# EAGLE board darwin-radio-panel (EAGLE 9.4.2)
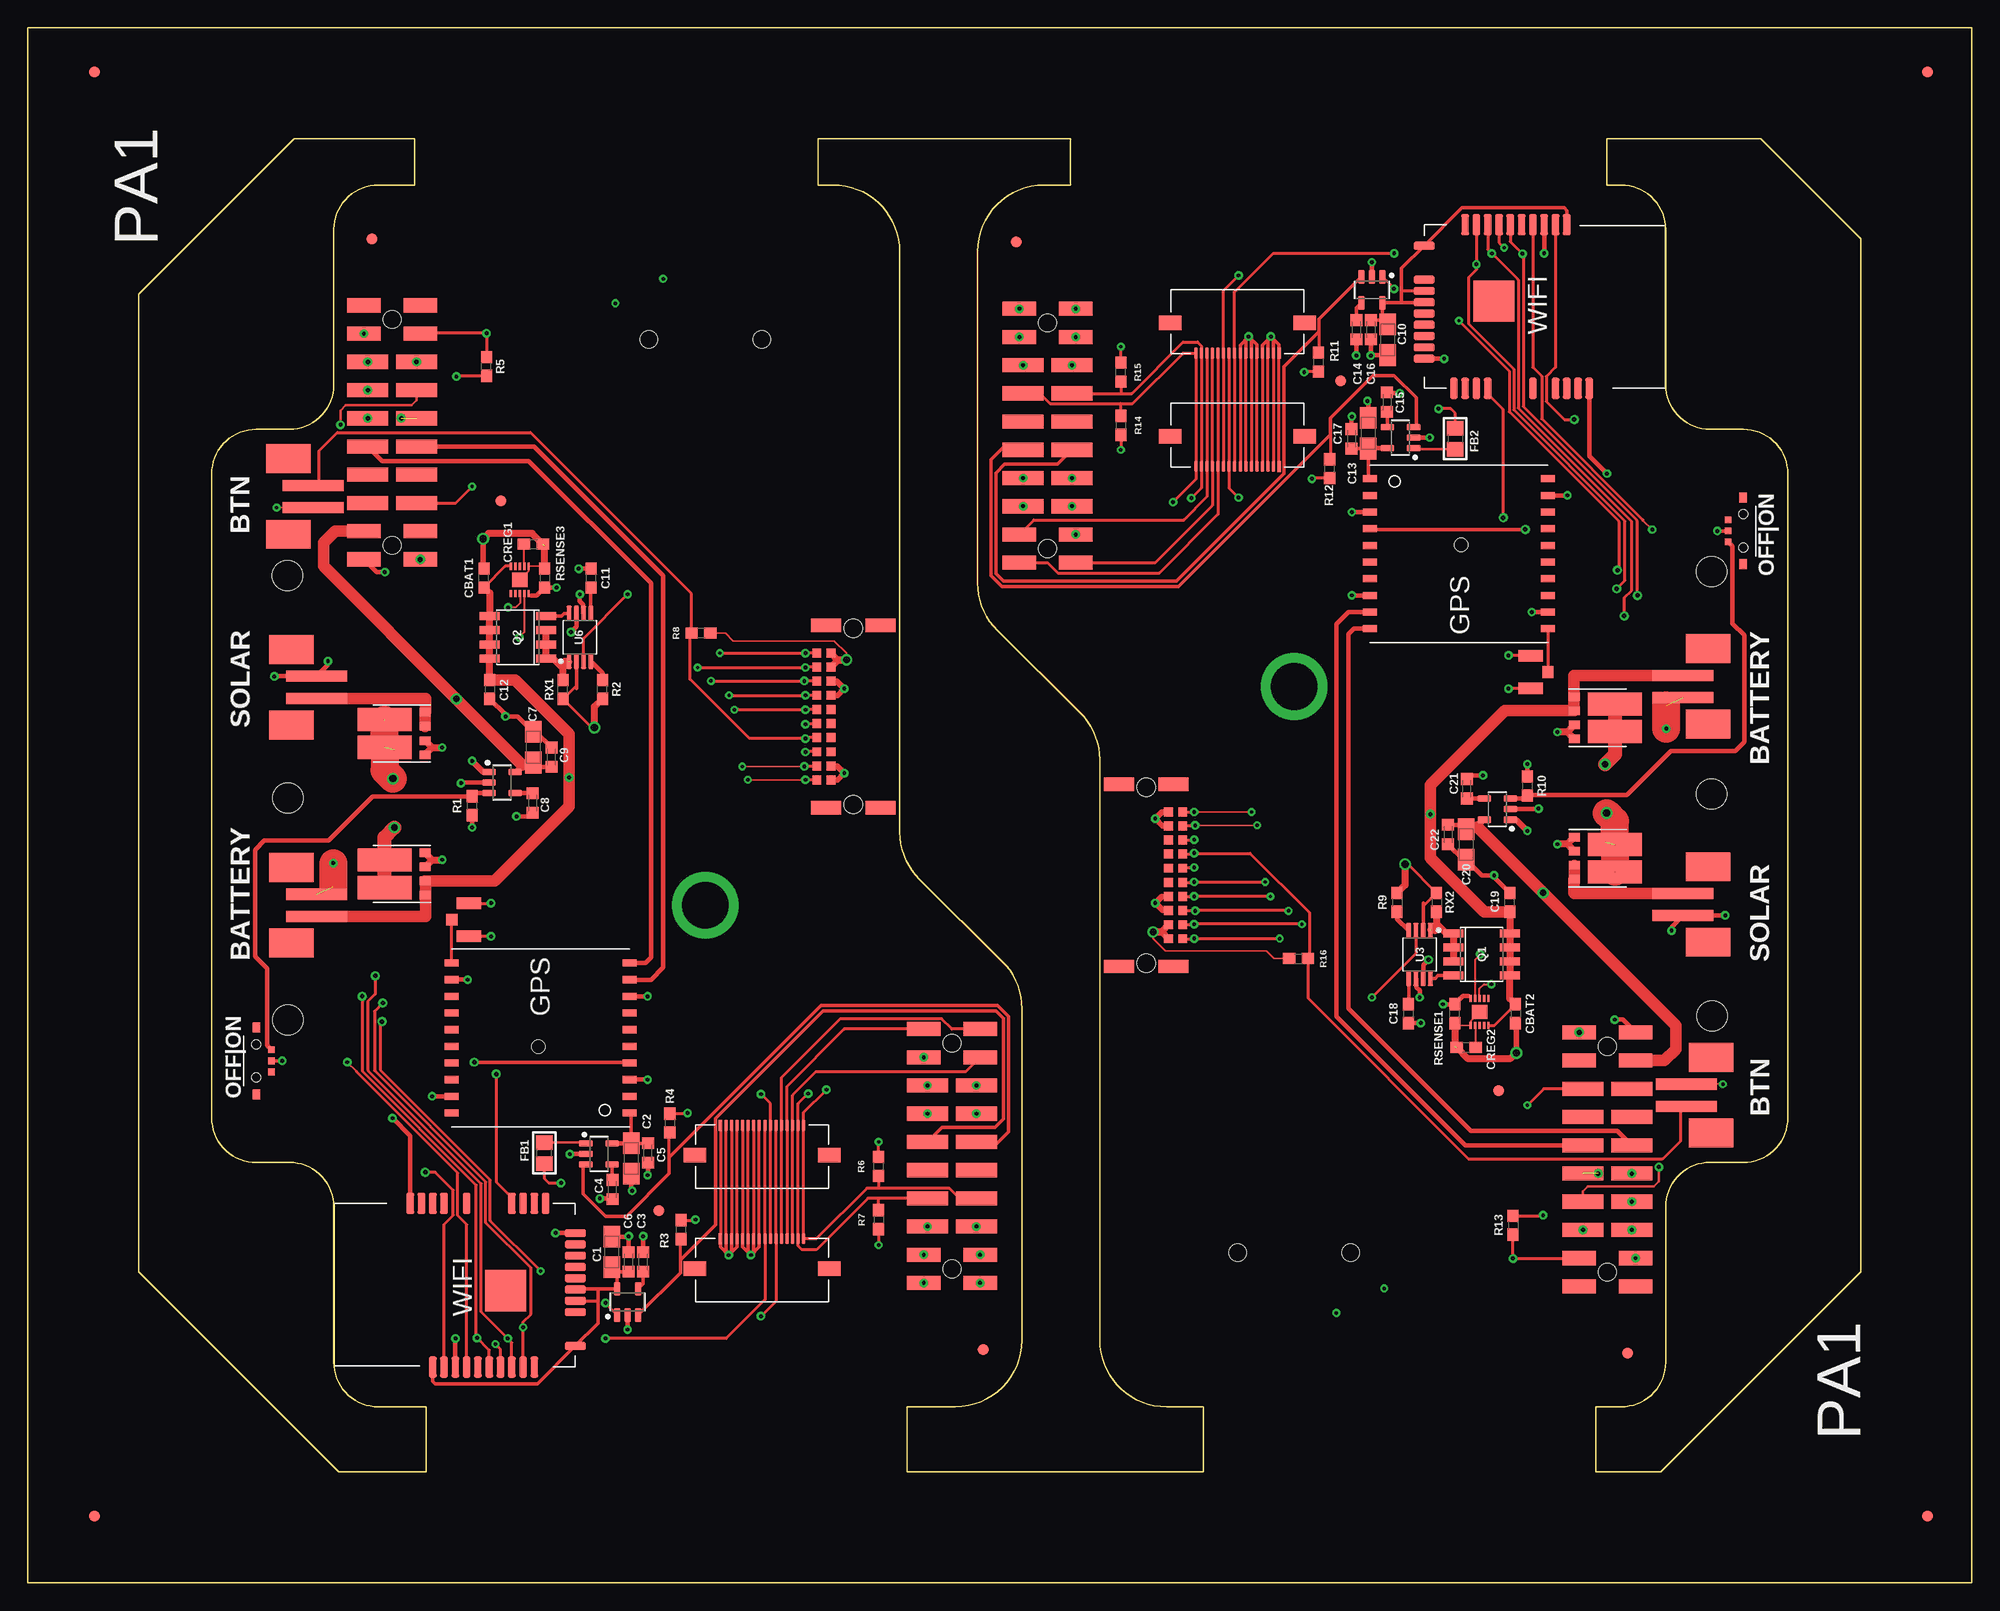
[diagram p0: board, top side]
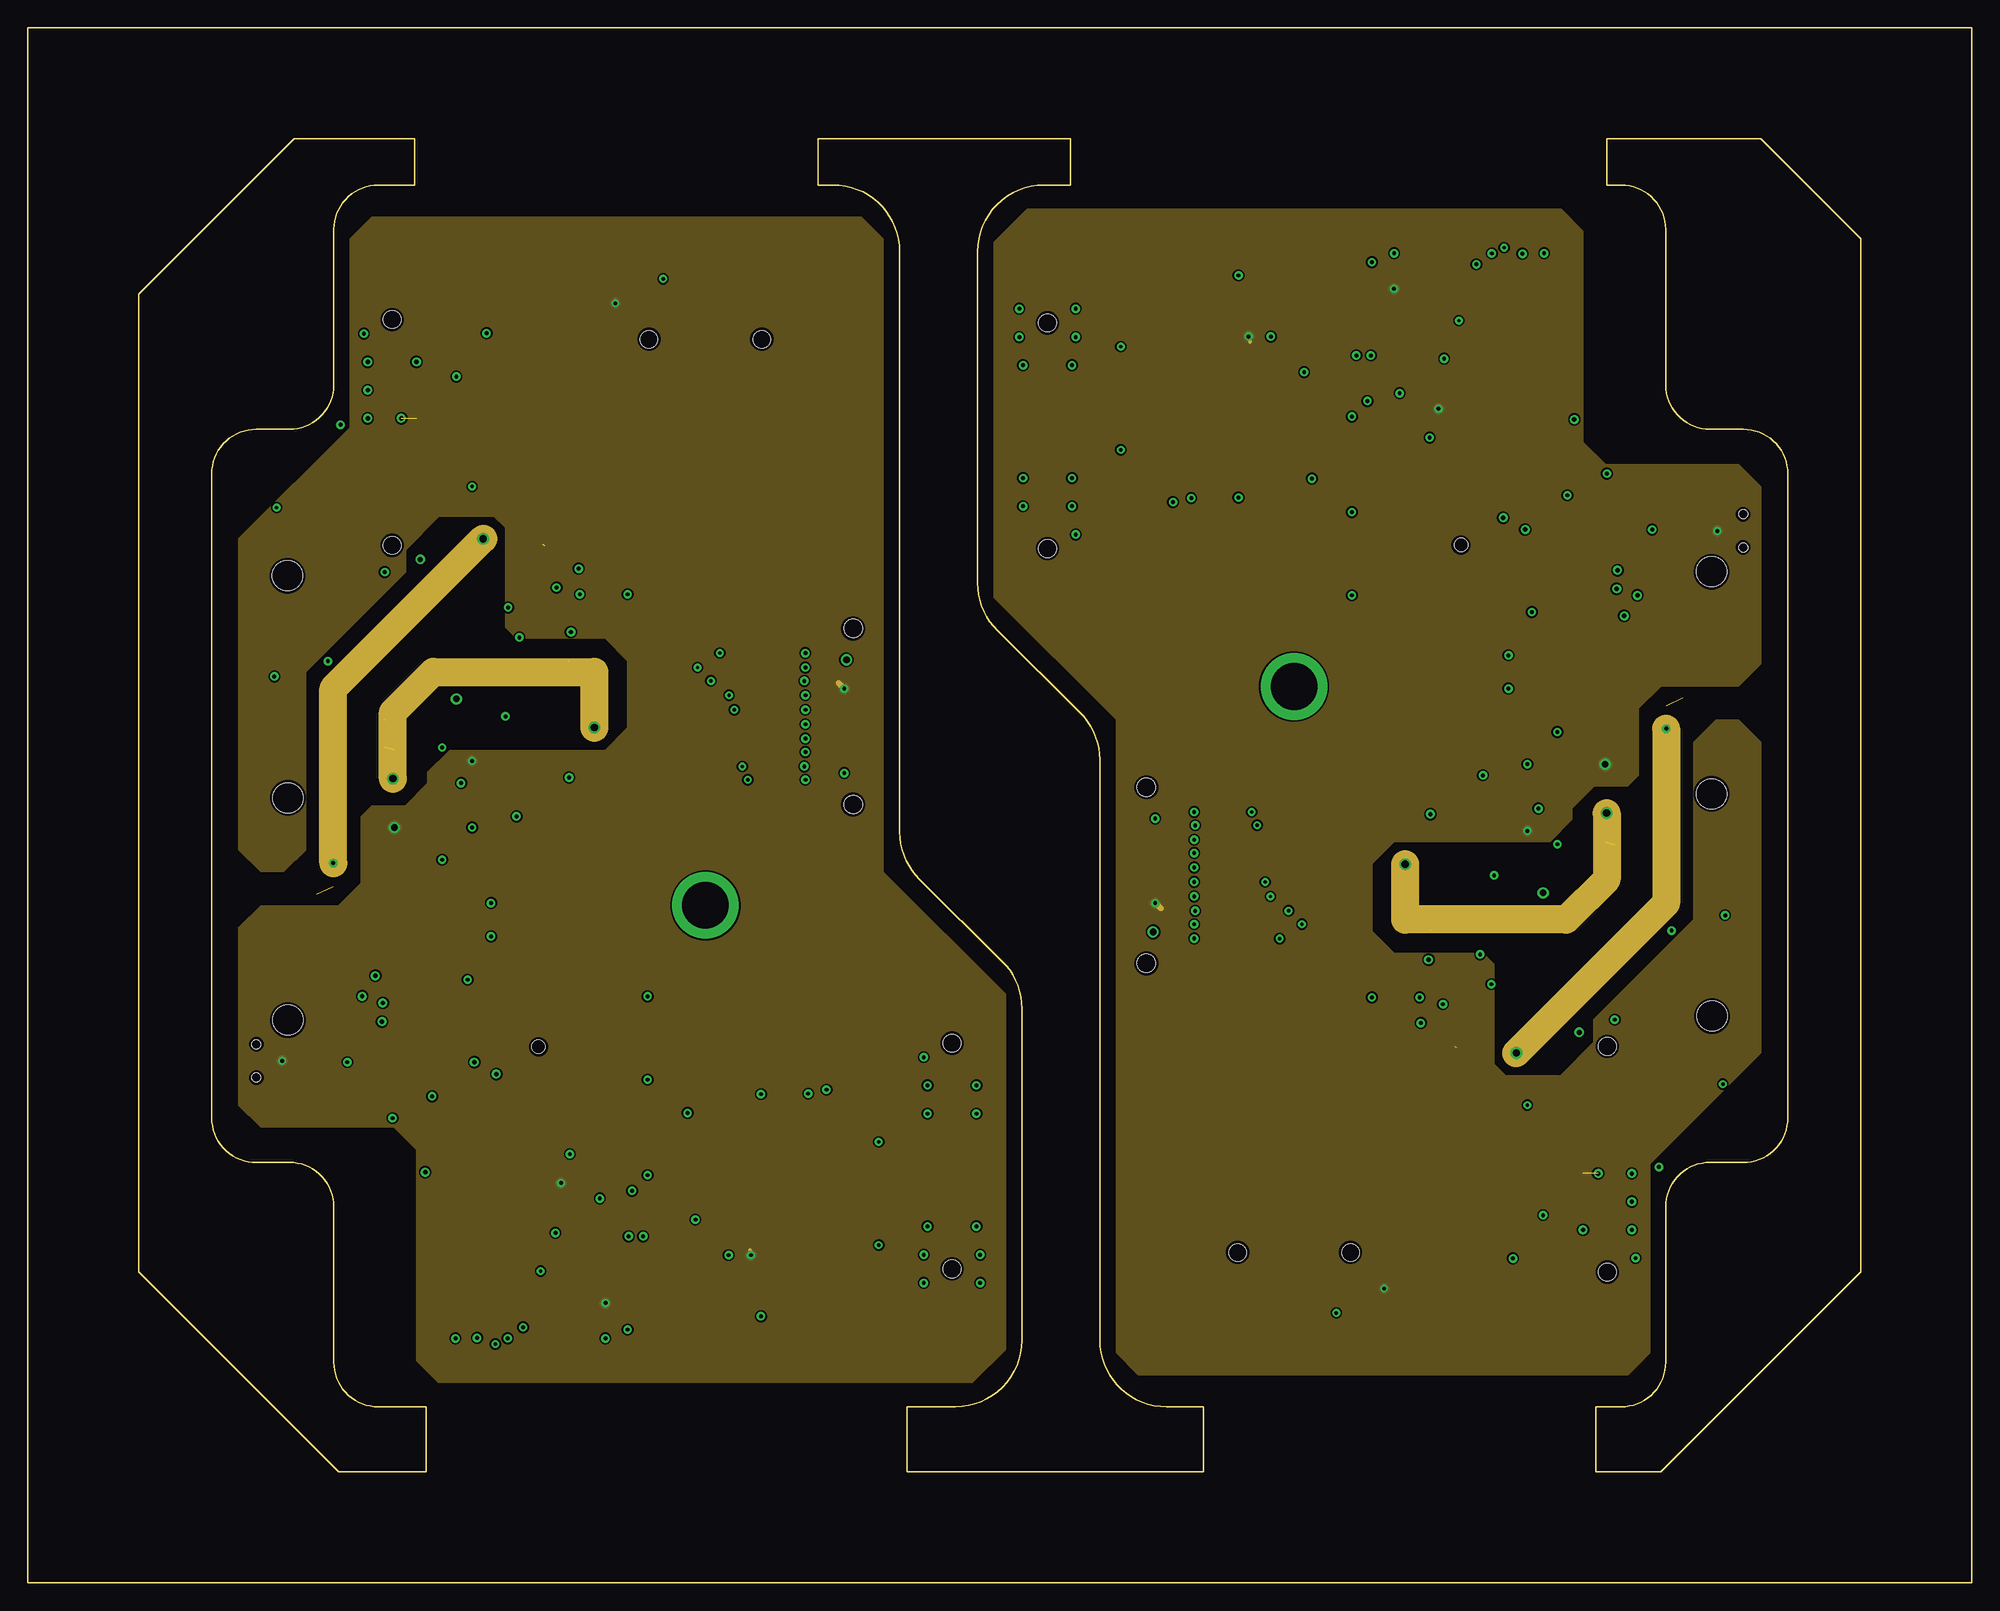
[diagram p1: board, inner layer PWR]
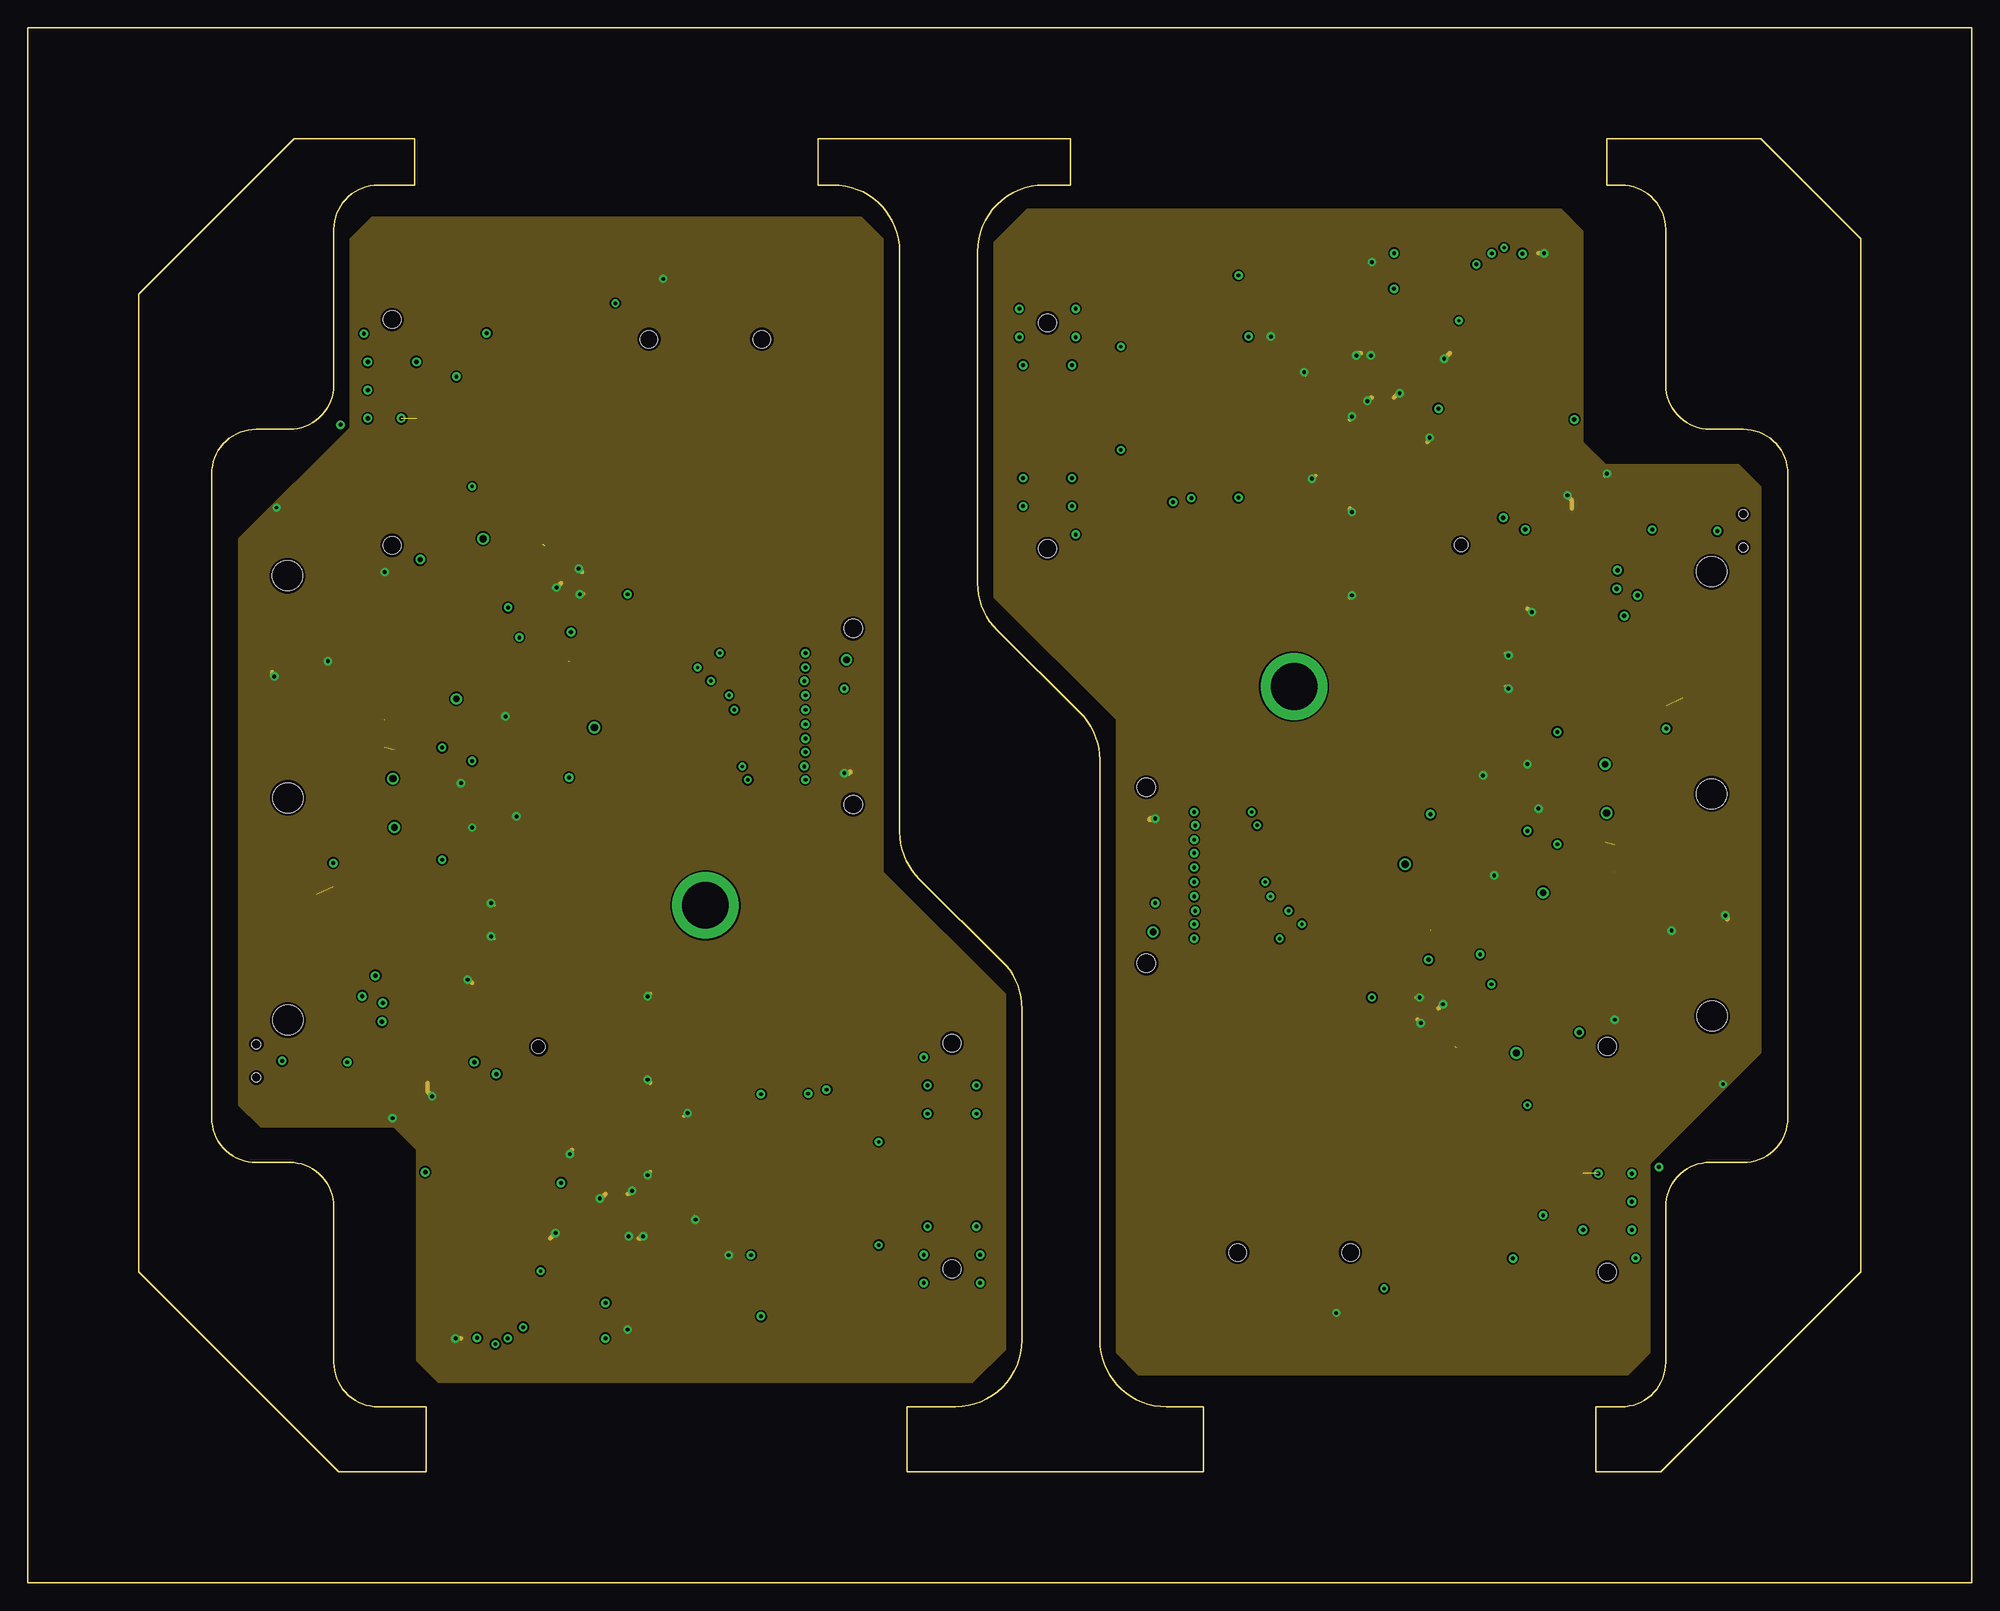
[diagram p2: board, inner layer GND]
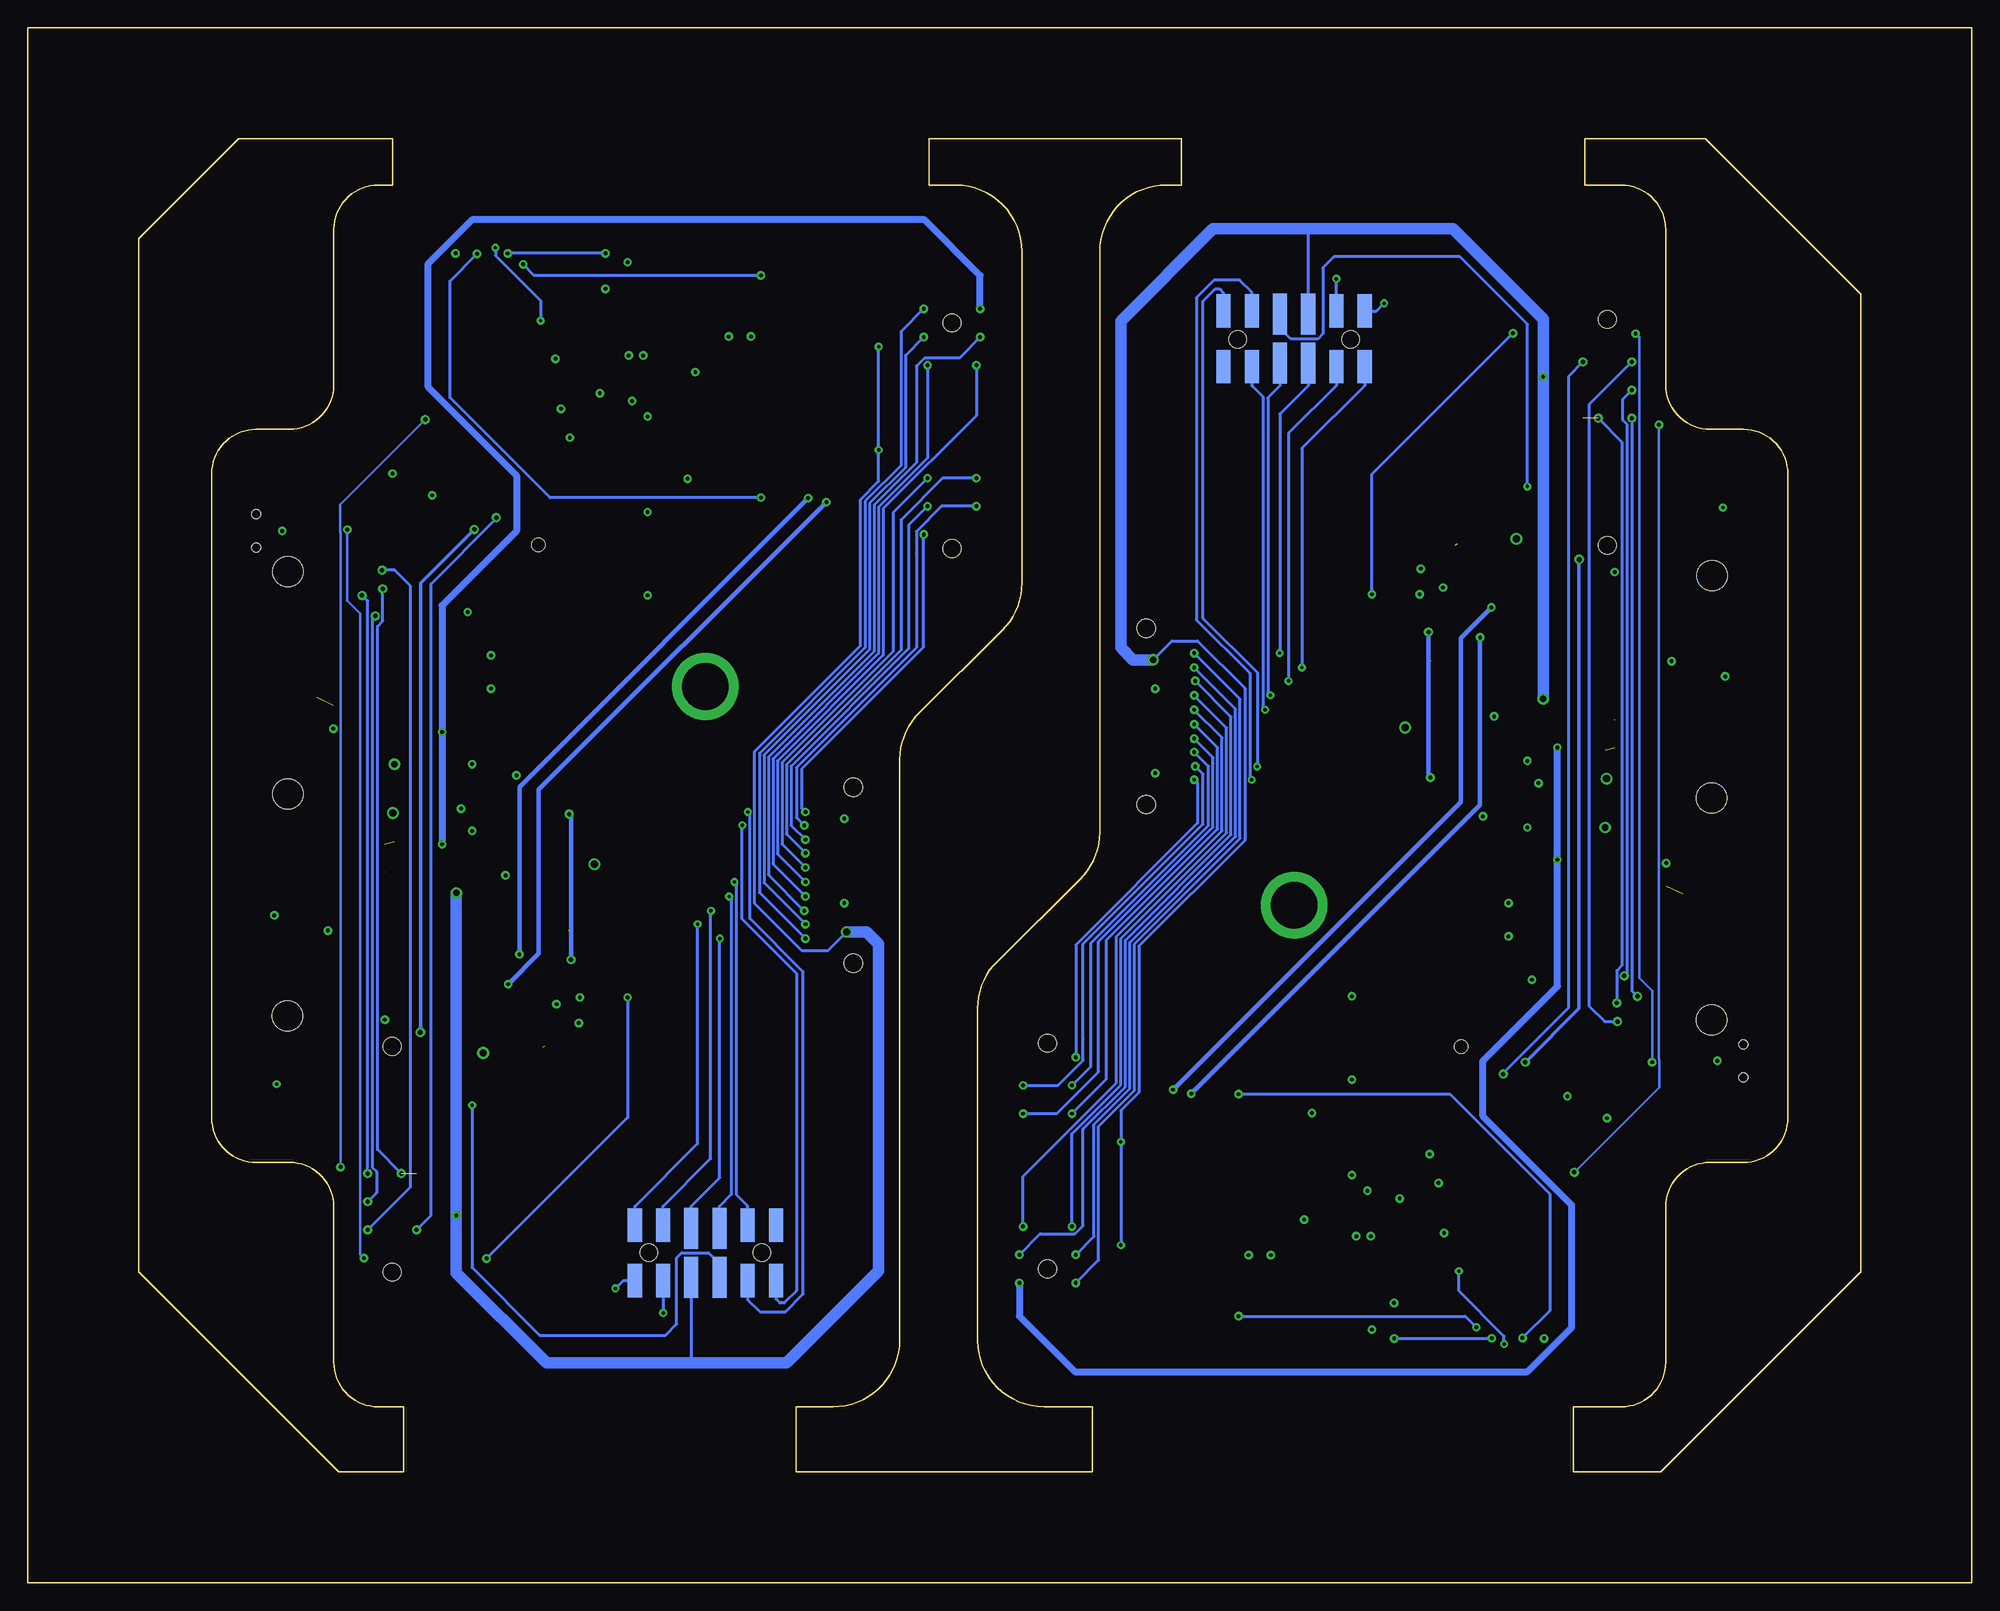
[diagram p3: board, bottom side, seen from below]

Size 175 x 140 mm. Coordinates in mm from the lower left corner, seen from the top.
Outline: 31.56,125.85 arc90 27.56,121.85 27.56,107.85 arc-90 23.56,103.85 20.56,103.85 arc90 16.56,99.85 16.56,41.85 arc90 20.56,37.85 23.56,37.85 arc-90 27.56,33.85 27.56,19.85 arc90 31.56,15.85 35.85,15.85 35.85,10 28,10 10,28 10,116 24,130 34.85,130 34.85,125.85 31.56,125.85
Outline: 83.5,15.85 arc90 89.5,21.85 89.5,51.7 arc45 87.72,55.96 80.28,63.34 arc-45 78.5,67.6 78.5,119.85 arc90 72.5,125.85 71.15,125.85 71.15,130 93.85,130 93.85,125.85 91.5,125.85 arc90 85.5,119.85 85.5,90 arc45 87.28,85.74 94.72,78.36 arc-45 96.5,74.1 96.5,21.85 arc90 102.5,15.85 105.85,15.85 105.85,10 79.15,10 79.15,15.85 83.5,15.85
Outline: 143.44,15.85 arc90 147.44,19.85 147.44,33.85 arc-90 151.44,37.85 154.44,37.85 arc90 158.44,41.85 158.44,99.85 arc90 154.44,103.85 151.44,103.85 arc-90 147.44,107.85 147.44,121.85 arc90 143.44,125.85 142.15,125.85 142.15,130 156,130 165,121 165,28 147,10 141.15,10 141.15,15.85 143.44,15.85
Outline: 0,0 0,140 175,140 175,0 0,0
Copper layers (1+2*15+16): Top 0.035mm / dielectric 1.5mm / PWR 0.035mm / dielectric 0.15mm / GND 0.035mm / dielectric 0.2mm / Bottom 0.035mm
Design rules "default *": minimum track width 6mil, minimum drill 0.3mm, track to track 6mil, track to pad 6mil, pad to pad 6mil, via to via 6mil, smd to smd 6mil, copper to edge 10mil, drill to drill 6mil, minimum pad ring 10mil, minimum via ring 8mil, stop-mask expansion 4mil, vias tented up to drill 1mm, thermal gap 10mil
Holes 2.7 mm at 23.42,50.67 23.42,70.67 23.37,90.67 151.58,91.03 151.58,71.03 151.63,51.03

## Footprints (pad centres in the part's own frame; a part is rotated, then mirrored left to right if it is on the bottom)
A/3216-18R = smd 1.95 x 1.5: + 1.375,0; - -1.375,0
C0603K = smd 1.05 x 1.08: 1 -0.875,0; 2 0.875,0
0603 = smd 1.1 x 1: 1 -0.85,0; 2 0.85,0
V10KL45DUHM3/H = smd 0.762 x 0.991: A1-1 -1.905,0.495; A1-2 -0.635,0.495; A2-1 0.635,0.495; A2-2 1.905,0.495 | smd 2.083 x 4.851: K1 -1.245,4.153; K2 1.245,4.153
0805 = smd 1.3 x 1.5: 1 -0.95,0; 2 0.95,0
FIDUCIAL_1MM = smd 1 x 1: 1 0,0
505110-1692 = smd 0.3 x 1: 1 -3.75,2.7; 2 -3.25,2.7; 3 -2.75,2.7; 4 -2.25,2.7; 5 -1.75,2.7; 6 -1.25,2.7; 7 -0.75,2.7; 8 -0.25,2.7; 9 0.25,2.7; 10 0.75,2.7; 11 1.25,2.7; 12 1.75,2.7; 13 2.25,2.7; 14 2.75,2.7; 15 3.25,2.7; 16 3.75,2.7 | smd 2 x 1.3: PAD1 -6.05,0; PAD2 6.05,0
M55-6102042R = smd 0.8 x 0.8: P1 -5.715,3.27; P2 -4.445,3.27; P3 -3.175,3.27; P4 -1.905,3.27; P5 -0.635,3.27; P6 0.635,3.27; P7 1.905,3.27; P8 3.175,3.27; P9 4.445,3.27; P10 5.715,3.27; P11 5.715,2; P12 4.445,2; P13 3.175,2; P14 1.905,2; P15 0.635,2; P16 -0.635,2; P17 -1.905,2; P18 -3.175,2; P19 -4.445,2; P20 -5.715,2 | smd 1.2 x 2.7: PAD0 -8.21,-2.45; PAD1 8.21,-2.45; PAD2 8.21,2.45; PAD3 -8.21,2.45 | hole 1.65: -7.925,0; 7.925,0
20PH = smd 3 x 1.27: PIN1 -0.34,0; PIN2 -0.34,-2.54; PIN9 -0.34,-20.32; PIN10 -0.34,-22.86; PIN11 4.74,-22.86; PIN12 4.74,-20.32; PIN19 4.74,-2.54; PIN20 4.74,0 | smd 3.68 x 1.27: PIN3 0,-5.08; PIN4 0,-7.62; PIN5 0,-10.16; PIN6 0,-12.7; PIN7 0,-15.24; PIN8 0,-17.78; PIN13 4.4,-17.78; PIN14 4.4,-15.24; PIN15 4.4,-12.7; PIN16 4.4,-10.16; PIN17 4.4,-7.62; PIN18 4.4,-5.08 | hole 1.58: 2.2,-1.27; 2.2,-21.59
SO08-IRF = smd 0.72 x 1.78: 1 -1.905,-2.543; 2 -0.635,-2.543; 3 0.635,-2.543; 4 1.905,-2.543; 5 1.905,2.543; 6 0.635,2.543; 7 -0.635,2.543; 8 -1.905,2.543
ATWINC = smd 1.9 x 0.7: 1 7.365,2.67; 2 7.365,3.686; 3 7.365,4.702; 4 7.365,5.718; 5 7.365,9.782; 6 7.365,11.814; 7 7.365,12.83; 8 7.365,13.846; 9 7.365,14.862; 10 -7.365,12.83; 11 -7.365,11.814; 12 -7.365,10.798; 13 -7.365,9.782; 14 -7.365,8.766; 15 -7.365,7.75; 16 -7.365,6.734; 17 -7.365,5.718; 18 -7.365,4.702; 19 -7.365,3.686 | smd 0.7 x 1.9: 20 -5.465,0; 21 -2.417,0; 22 -1.401,0; 23 -0.385,0; 24 0.631,0; 25 1.647,0; 26 2.663,0; 27 3.679,0; 28 4.695,0 | smd 3.7 x 3.7: PAD -0.485,6.27
SOP65P490X110-8 = smd 1.412 x 0.492: 1 -2.15,0.975; 2 -2.15,0.325; 3 -2.15,-0.325; 4 -2.15,-0.975; 5 2.15,-0.975; 6 2.15,-0.325; 7 2.15,0.325; 8 2.15,0.975
GPS_MODULE = smd 1.27 x 0.635: P$1 -8,6.75; P$2 -8,5.25; P$3 -8,3.75; P$4 -8,2.25; P$5 -8,0.75; P$6 -8,-0.75; P$7 -8,-2.25; P$8 -8,-3.75; P$9 -8,-5.25; P$10 -8,-6.75; P$11 8,-6.75; P$12 8,-5.25; P$13 8,-3.75; P$14 8,-2.25; P$15 8,-0.75; P$16 8,0.75; P$17 8,2.25; P$18 8,3.75; P$19 8,5.25; P$20 8,6.75 | hole 1.2: 0.2,0.8
SOT95P280X145-5 = smd 1.262 x 0.609: 1 -1.175,0.95; 2 -1.175,0; 3 -1.175,-0.95; 4 1.175,-0.95; 5 1.175,0.95
SSAJ110100 = smd 0.6 x 0.6: 1 1,1.355; 2 -1,1.355; C 0,1.355 | smd 0.9 x 0.7: PAD -3,0; PAD2 3,0 | hole 0.8: -1.5,0; 1.5,0
B2B-PH-SM4-TB = smd 1 x 5.5: + -1,-1; - 1,-1 | smd 2.6 x 4: PAD1 3.4,1.25; PAD2 -3.4,1.25
12PH = smd 3 x 1.27: 1 -2.5,6.35; 2 -2.5,3.81; 5 -2.5,-3.81; 6 -2.5,-6.35; 7 2.5,-6.35; 8 2.5,-3.81; 11 2.5,3.81; 12 2.5,6.35 | smd 3.68 x 1.27: 3 -2.2,1.27; 4 -2.2,-1.27; 9 2.2,-1.27; 10 2.2,1.27 | hole 1.58: 0.041,5.08; 0.041,-5.08
2337019-1 = smd 1.05 x 1: ANT 0,-1.525 | smd 1.05 x 2.2: GND -1.475,0; GND2 1.475,0
10DFN-EP = smd 0.2 x 0.65: P1 -0.8,-1.225; P2 -0.4,-1.225; P3 0,-1.225; P4 0.4,-1.225; P5 0.8,-1.225; P6 0.8,1.225; P7 0.4,1.225; P8 0,1.225; P9 -0.4,1.225; P10 -0.8,1.225 | smd 1.4 x 1.3: PAD 0,0

## Placement (x,y rotation side)
C1  6.8uf  [A/3216-18R]  52.59,29.79 270 top
C2  6.8uf  [A/3216-18R]  54.33,38.21 90 top
C3  [C0603K]  55.39,28.89 90 top
C4  [C0603K]  52.63,35.41 270 top
C5  .1uf  [C0603K]  55.83,38.71 270 top
C6  .1uf  [C0603K]  54.09,28.89 90 top
C7  6.8uf  [A/3216-18R]  45.5,75.23 270 top
C8  [C0603K]  45.46,70.21 270 top
C9  .1uf  [C0603K]  47.14,74.33 90 top
C10  6.8uf  [A/3216-18R]  122.41,111.91 90 top
C11  0.1uF  [0603]  50.73,90.46 90 top
C12  10uF  [0603]  41.58,80.43 270 top
C13  6.8uf  [A/3216-18R]  120.67,103.49 270 top
C14  [C0603K]  119.61,112.81 270 top
C15  [C0603K]  122.37,106.29 90 top
C16  .1uf  [C0603K]  120.91,112.81 270 top
C17  .1uf  [C0603K]  119.17,102.99 90 top
C18  0.1uF  [0603]  124.27,51.24 270 top
C19  10uF  [0603]  133.42,61.27 90 top
C20  6.8uf  [A/3216-18R]  129.5,66.47 90 top
C21  [C0603K]  129.54,71.49 90 top
C22  .1uf  [C0603K]  127.86,67.37 270 top
CBAT1  0.1uF  [0603]  41.07,90.46 90 top
CBAT2  0.1uF  [0603]  133.93,51.24 270 top
CREG1  10uF  [0603]  45.52,93.51 0 top
CREG2  10uF  [0603]  129.48,48.19 180 top
D1  V10KL45DUHM3/H  [V10KL45DUHM3/H]  36.27,63.82 90 top
D2  V10KL45DUHM3/H  [V10KL45DUHM3/H]  138.73,77.88 270 top
D3  V10KL45DUHM3/H  [V10KL45DUHM3/H]  36.27,76.46 90 top
D4  V10KL45DUHM3/H  [V10KL45DUHM3/H]  138.73,65.24 270 top
FB1  [0805]  46.5,38.7 90 top
FB2  [0805]  128.5,103 270 top
FID1  FIDUCIAL_1MM  [FIDUCIAL_1MM]  86,21 90 top
FID2  FIDUCIAL_1MM  [FIDUCIAL_1MM]  31,121 90 top
FID3  FIDUCIAL_1MM  [FIDUCIAL_1MM]  42.6,97.4 90 top
FID4  FIDUCIAL_1MM  [FIDUCIAL_1MM]  56.8,33.5 90 top
FID5  FIDUCIAL_1MM  [FIDUCIAL_1MM]  89,120.7 270 top
FID6  FIDUCIAL_1MM  [FIDUCIAL_1MM]  144,20.7 270 top
FID7  FIDUCIAL_1MM  [FIDUCIAL_1MM]  132.4,44.3 270 top
FID8  FIDUCIAL_1MM  [FIDUCIAL_1MM]  118.2,108.2 270 top
FID9  FIDUCIAL_1MM  [FIDUCIAL_1MM]  6,136 90 top
FID10  FIDUCIAL_1MM  [FIDUCIAL_1MM]  171,136 90 top
FID11  FIDUCIAL_1MM  [FIDUCIAL_1MM]  171,6 90 top
FID12  FIDUCIAL_1MM  [FIDUCIAL_1MM]  6,6 90 top
J1  505110-1692  [505110-1692]  66.1,28.28 0 top
J2  505110-1692  [505110-1692]  66.1,38.49 0 top
J3  M55-6102042R  [M55-6102042R]  74.3,78 90 top
J4  505110-1692  [505110-1692]  108.9,113.42 180 top
J5  505110-1692  [505110-1692]  108.9,103.21 180 top
J6  M55-6102042R  [M55-6102042R]  100.7,63.7 270 top
LOWER1  MOLEX-15-91-2200  [20PH]  81,49.86 0 top
LOWER2  MOLEX-15-91-2200  [20PH]  94,91.84 180 top
Q1  NDS8434  [SO08-IRF]  130.88,56.57 270 top
Q2  NDS8434  [SO08-IRF]  44.12,85.13 90 top
R1  100k  [0603]  40.02,69.96 90 top
R2  100k  [0603]  51.74,80.43 90 top
R3  100k  [0603]  58.8,31.8 270 top
R4  100k  [0603]  57.8,41.4 270 top
R5  100k  [0603]  41.3,109.5 90 top
R6  100k  [0603]  76.6,37.5 90 top
R7  100k  [0603]  76.6,32.7 270 top
R8  100k  [0603]  60.6,85.5 180 top
R9  100k  [0603]  123.26,61.27 270 top
R10  100k  [0603]  134.98,71.74 270 top
R11  100k  [0603]  116.2,109.9 90 top
R12  100k  [0603]  117.2,100.3 90 top
R13  100k  [0603]  133.7,32.2 270 top
R14  100k  [0603]  98.4,104.2 270 top
R15  100k  [0603]  98.4,109 90 top
R16  100k  [0603]  114.4,56.2 0 top
RSENSE1  100M  [0603]  128.47,51.24 90 top
RSENSE3  100M  [0603]  46.53,90.46 270 top
RX1  100M  [0603]  48.19,80.43 90 top
RX2  100M  [0603]  126.81,61.27 270 top
U1  ATWINC  [ATWINC]  49.29,26.79 90 top
U2  ATWINC  [ATWINC]  125.71,114.91 270 top
U3  MCP7384X  [SOP65P490X110-8]  125.29,56.57 270 top
U6  MCP7384X  [SOP65P490X110-8]  49.71,85.13 90 top
U$1  FGPMMOPA6H  [GPS_MODULE]  46.17,49.05 180 top
U$2  MIC5219-3.3YM5-TR  [SOT95P280X145-5]  51.43,38.61 0 top
U$3  MIC5219-3.3YM5-TR  [SOT95P280X145-5]  53.99,25.29 90 top
U$4  MIC5219-3.3YM5-TR  [SOT95P280X145-5]  42.7,72.05 0 top
U$5  SSAJ110100  [SSAJ110100]  20.58,46.99 270 top
U$6  B2B-PH-SM4-TB  [B2B-PH-SM4-TB]  25,80.63 90 top
U$7  B2B-PH-SM4-TB  [B2B-PH-SM4-TB]  25,61 90 top
U$8  2X6-HEADERSDS  [12PH]  61,112 270 bottom
U$9  B2B-PH-SM4-TB  [B2B-PH-SM4-TB]  24.7,97.8 90 top
U$10  FGPMMOPA6H  [GPS_MODULE]  128.83,92.65 0 top
U$11  2337019-1  [2337019-1]  39.7,59.7 270 top
U$12  MAX17055  [10DFN-EP]  44.3,90.3 0 top
U$13  MIC5219-3.3YM5-TR  [SOT95P280X145-5]  123.57,103.09 180 top
U$14  MIC5219-3.3YM5-TR  [SOT95P280X145-5]  121.01,116.41 270 top
U$15  MIC5219-3.3YM5-TR  [SOT95P280X145-5]  132.3,69.65 180 top
U$16  SSAJ110100  [SSAJ110100]  154.42,94.71 90 top
U$17  B2B-PH-SM4-TB  [B2B-PH-SM4-TB]  150,61.07 270 top
U$18  B2B-PH-SM4-TB  [B2B-PH-SM4-TB]  150,80.7 270 top
U$19  MAX17055  [10DFN-EP]  130.7,51.4 180 top
U$20  2337019-1  [2337019-1]  135.3,82 90 top
U$21  2X6-HEADERSDS  [12PH]  114,29.7 90 bottom
U$22  B2B-PH-SM4-TB  [B2B-PH-SM4-TB]  150.3,43.9 270 top
UPPER1  MOLEX-15-91-2200  [20PH]  35,92.14 180 top
UPPER2  MOLEX-15-91-2200  [20PH]  140,49.56 0 top

## Library data of the parts
C1-C10 C13-C17 C20-C22 = rcl; SPICEPREFIX: C
C11 C18 CBAT1 CBAT2 = SparkFun-Capacitors; PROD_ID: CAP-00810
C12 C19 CREG1 CREG2 = SparkFun-Capacitors; PROD_ID: CAP-11015
D1-D4 J1-J6 LOWER1 LOWER2 Q1 Q2 U1-U3 U6 U$1-U$22 UPPER1 UPPER2 = Conservify
FB1 FB2 = microbuilder
FID1-FID12 = microbuilder; BOM: EXCLUDE
R1-R16 = SparkFun-Resistors; PROD_ID: RES-07828
RSENSE1 RSENSE3 RX1 RX2 = SparkFun-Resistors; PROD_ID: RES-07868

## Nets
3V1: C20.+ C22.1 J6.P11 J6.P12 R13.1 R14.2 R15.2 R16.1 U$15.5 U$21.3 UPPER2.PIN19
3V3: C7.+ C9.1 J3.P11 J3.P12 R5.1 R6.2 R7.2 R8.1 U$4.5 U$8.3 UPPER1.PIN19
BACKPACK_ENABLE: U$8.4 UPPER1.PIN3
BACKPACK_ENABLE1: U$21.4 UPPER2.PIN3
BAT+: C12.1 CBAT1.1 D1.A1-1 D1.A1-2 Q2.5 Q2.6 Q2.7 Q2.8 U6.7 U$7.+ U$12.P10
BAT+1: C19.1 CBAT2.1 D2.A1-1 D2.A1-2 Q1.5 Q1.6 Q1.7 Q1.8 U3.7 U$18.+ U$19.P10
BAT-: CBAT1.2 CREG1.2 RSENSE3.1 U$7.- U$12.P6 U$12.PAD
BAT-1: CBAT2.2 CREG2.2 RSENSE1.1 U$18.- U$19.P6 U$19.PAD
CHARGESUPPLY: D3.K1 D3.K2 R2.1 RX1.1 U6.2
CHARGESUPPLY1: D4.K1 D4.K2 R9.1 RX2.1 U3.2
CHARGING: R5.2 U6.3 UPPER1.PIN9
CHARGING1: R13.2 U3.3 UPPER2.PIN9
D+: LOWER1.PIN6
D+1: LOWER2.PIN6
D-: LOWER1.PIN15
D-1: LOWER2.PIN15
EEPROM_PROT: J3.P1 LOWER1.PIN2 U$8.5
EEPROM_PROT1: J6.P1 LOWER2.PIN2 U$21.5
GND: C1.- C2.- C3.2 C4.2 C5.2 C6.2 C7.- C8.2 C9.2 C11.2 C12.2 J1.1 J1.2 J1.3 J1.4 J2.1 J2.2 J2.3 J2.4 J3.P19 J3.P20 R1.1 R3.1 R4.1 RSENSE3.2 U1.9 U1.12 U1.28 U6.6 U$1.P$3 U$1.P$8 U$1.P$12 U$1.P$19 U$2.2 U$3.2 U$4.2 U$6.- U$8.2 U$9.+ U$11.GND U$11.GND2 U$12.P5 UPPER1.PIN20
GND1: C10.- C13.- C14.2 C15.2 C16.2 C17.2 C18.2 C19.2 C20.- C21.2 C22.2 J4.1 J4.2 J4.3 J4.4 J5.1 J5.2 J5.3 J5.4 J6.P19 J6.P20 R10.1 R11.1 R12.1 RSENSE1.2 U2.9 U2.12 U2.28 U3.6 U$10.P$3 U$10.P$8 U$10.P$12 U$10.P$19 U$13.2 U$14.2 U$15.2 U$17.- U$19.P5 U$20.GND U$20.GND2 U$21.2 U$22.+ UPPER2.PIN20
GPS_ENABLE: LOWER1.PIN16 R4.2 U$2.3
GPS_ENABLE1: LOWER2.PIN16 R12.2 U$13.3
GPS_RX: U$1.P$9 UPPER1.PIN5
GPS_RX1: U$10.P$9 UPPER2.PIN5
GPS_TX: U$1.P$10 UPPER1.PIN16
GPS_TX1: U$10.P$10 UPPER2.PIN16
HOTSWAP_INT: J3.P3 LOWER1.PIN3
HOTSWAP_INT1: J6.P3 LOWER2.PIN3
MOD_G0: J1.13 J2.13 LOWER1.PIN1
MOD_G1: J4.13 J5.13 LOWER2.PIN1
MOD_G2: J3.P2 LOWER1.PIN18 U$8.6
MOD_G3: J6.P2 LOWER2.PIN18 U$21.6
MOD_G4: J6.P5 LOWER2.PIN4
MOD_G5: J3.P5 LOWER1.PIN4
MOD_G6: J4.14 J5.14 LOWER2.PIN19
MOD_G7: J4.12 J5.12 LOWER2.PIN20
MOD_G13: J1.14 J2.14 LOWER1.PIN19
MOD_G14: J1.12 J2.12 LOWER1.PIN20
MOD_MISO: J3.P10 LOWER1.PIN10 U$8.10
MOD_MISO1: J6.P10 LOWER2.PIN10 U$21.10
MOD_MOSI: J3.P8 LOWER1.PIN12 U$8.11
MOD_MOSI1: J6.P8 LOWER2.PIN12 U$21.11
MOD_SCK: J3.P9 LOWER1.PIN9 U$8.12
MOD_SCK1: J6.P9 LOWER2.PIN9 U$21.12
MOD_SCL: J3.P6 LOWER1.PIN13 U$8.8
MOD_SCL1: J6.P6 LOWER2.PIN13 U$21.8
MOD_SDA: J3.P7 LOWER1.PIN8 U$8.9
MOD_SDA1: J6.P7 LOWER2.PIN8 U$21.9
N$1: C3.1 U$3.4
N$2: C4.1 U$2.4
N$3: C2.+ C5.1 U$1.P$1 U$2.5
N$4: U$1.P$11 U$11.ANT
N$5: R2.2 U6.4
N$6: C8.1 U$4.4
N$7: FB1.2 U$2.1
N$8: R1.2 U$4.3 U$5.2
N$11: C14.1 U$14.4
N$12: C15.1 U$13.4
N$13: C13.+ C17.1 U$10.P$1 U$13.5
N$14: Q2.1 Q2.2 Q2.3 RX1.2 U6.1
N$16: Q1.1 Q1.2 Q1.3 RX2.2 U3.1
N$17: Q2.4 U6.8
N$18: C11.1 U6.5
N$19: CREG1.1 U$12.P7
N$20: Q1.4 U3.8
N$21: C18.1 U3.5
N$22: CREG2.1 U$19.P7
N$23: R9.2 U3.4
N$24: C21.1 U$15.4
N$25: R10.2 U$15.3 U$16.2
N$26: U$10.P$11 U$20.ANT
N$27: FB2.2 U$13.1
PIN1: U$21.7
PIN7: U$8.7
RAD_SCL: J1.16 J2.16 LOWER1.PIN14 R6.1 U$12.P3
RAD_SCL1: J4.16 J5.16 LOWER2.PIN14 R14.1 U$19.P3
RAD_SDA: J1.15 J2.15 LOWER1.PIN7 R7.1 U$12.P4
RAD_SDA1: J4.15 J5.15 LOWER2.PIN7 R15.1 U$19.P4
RADIO_MISO: J1.9 J2.9 U1.17 UPPER1.PIN14
RADIO_MISO1: J4.9 J5.9 U2.17 UPPER2.PIN14
RADIO_MOSI: J1.10 J2.10 U1.15 UPPER1.PIN15
RADIO_MOSI1: J4.10 J5.10 U2.15 UPPER2.PIN15
RADIO_SCK: J1.11 J2.11 U1.18 UPPER1.PIN6
RADIO_SCK1: J4.11 J5.11 U2.18 UPPER2.PIN6
RESET: UPPER1.PIN4
RESET1: UPPER2.PIN4
SOL+: D3.A2-1 D3.A2-2 U$6.+
SOL+1: D4.A2-1 D4.A2-2 U$17.+
SWCLK: UPPER1.PIN10
SWCLK1: UPPER2.PIN10
SWDIO: UPPER1.PIN11
SWDIO1: UPPER2.PIN11
UNREG: D1.K1 D1.K2 FB1.1 J1.5 J1.6 J1.7 J1.8 J2.5 J2.6 J2.7 J2.8 J3.P13 J3.P14 U$3.1 U$4.1 U$5.C U$8.1
UNREG1: D2.K1 D2.K2 FB2.1 J4.5 J4.6 J4.7 J4.8 J5.5 J5.6 J5.7 J5.8 J6.P13 J6.P14 U$14.1 U$15.1 U$16.C U$21.1
V1: D2.A2-1 D2.A2-2 D4.A1-1 D4.A1-2 LOWER2.PIN11
V5: D1.A2-1 D1.A2-2 D3.A1-1 D3.A1-2 LOWER1.PIN11
VBACKUP: U$1.P$4 UPPER1.PIN1
VBACKUP1: U$10.P$4 UPPER2.PIN1
WIFI_3V1: C10.+ C16.1 U2.10 U2.20 U2.22 U2.23 U$14.5
WIFI_3V3: C1.+ C6.1 U1.10 U1.20 U1.22 U1.23 U$3.5
WIFI_CS: U1.16 UPPER1.PIN13
WIFI_CS1: U2.16 UPPER2.PIN13
WIFI_ENABLE: LOWER1.PIN5 R3.2 U$3.3
WIFI_ENABLE1: LOWER2.PIN5 R11.2 U$14.3
WIFI_IRQ: U1.13 UPPER1.PIN12
WIFI_IRQ1: U2.13 UPPER2.PIN12
WIFI_RST: U1.4 UPPER1.PIN8
WIFI_RST1: U2.4 UPPER2.PIN8
WIFI_WAKE: U1.11 UPPER1.PIN7
WIFI_WAKE1: U2.11 UPPER2.PIN7
X1: UPPER2.PIN2
X2: UPPER1.PIN2
X3: UPPER2.PIN17
X4: UPPER1.PIN17
X5: UPPER1.PIN18
X6: UPPER2.PIN18
XBTN: J3.P4 LOWER1.PIN17 R8.2 U$9.-
XBTN1: J6.P4 LOWER2.PIN17 R16.2 U$22.-
XX1: J3.P18
XX2: J3.P17
XX3: J3.P16
XX4: J3.P15
XX5: J6.P16
XX6: J6.P18
XX7: J6.P17
XX8: J6.P15

## Tracks (layer width: path | path; a pad name or v marks a point on that pad's centre or on a via)
3V1  (via drill 0.3, 0.35, 0.6)
  Top 0.152: R16.1 112.2,56.2 111.5,56.9 102.4,56.9 101.3,58 v101.3,58.6
  Top 0.254: R13.1 136.37,33.05 v136.42,33.1 | R15.2 v98.4,111.3 | R14.2 v98.4,102
  Top 0.406: U$15.5 130.48,68.06 130.27,67.84 C20.+ 129.1,68.24 C22.1
  Top 0.61: J6.P11 102.08,58.6 v101.3,58.6 102.05,58.6 J6.P12
  Top 1.016: UPPER2.PIN19 147.35,47.02 148.37,48.04 148.37,50.17 v136.42,62.12 130.48,68.06
  Bottom 0.152: 115.27,19.83 115.3,19.8
  Bottom 0.254: v101.3,58.6 103,56.9 105.3,56.9 109.55,61.15 109.55,74.85 100.03,84.37 100.03,97.54 98.4,99.17 v98.4,102 v98.4,111.3 | U$21.3 115.27,19.83
  Bottom 1.016: v136.42,62.12 v136.42,33.1 136.42,27.92 128.3,19.8 115.3,19.8 106.7,19.8 98.4,28.1 98.4,57.5 99.5,58.6 v101.3,58.6
3V3  (via drill 0.3, 0.35, 0.6)
  Top 0.152: R8.1 62.8,85.5 63.5,84.8 72.6,84.8 73.7,83.7 v73.7,83.1
  Top 0.254: R5.1 38.63,108.65 v38.58,108.6 | R7.2 v76.6,30.4 | R6.2 v76.6,39.7
  Top 0.406: U$4.5 44.52,73.64 44.73,73.86 C7.+ 45.9,73.46 C9.1
  Top 0.61: J3.P11 72.92,83.1 v73.7,83.1 72.95,83.1 J3.P12
  Top 1.016: UPPER1.PIN19 27.65,94.68 26.63,93.66 26.63,91.53 v38.58,79.58 44.52,73.64
  Bottom 0.152: 59.73,121.87 59.7,121.9
  Bottom 0.254: v73.7,83.1 72,84.8 69.7,84.8 65.45,80.55 65.45,66.85 74.97,57.33 74.97,44.16 76.6,42.53 v76.6,39.7 v76.6,30.4 | U$8.3 59.73,121.87
  Bottom 1.016: v38.58,79.58 v38.58,108.6 38.58,113.78 46.7,121.9 59.7,121.9 68.3,121.9 76.6,113.6 76.6,84.2 75.5,83.1 v73.7,83.1
BACKPACK_ENABLE  (via drill 0.3)
  Top 0.254: UPPER1.PIN3 38.52,97.22 v40,98.7
  Bottom 0.152: U$8.4 62.15,114.08 62.15,112.85
  Bottom 0.254: v40,98.7 40,113.3 46.1,119.4 57.4,119.4 58.42,118.38 58.42,112.44 58.88,111.98 61.28,111.98 62.15,112.85
BACKPACK_ENABLE1  (via drill 0.3)
  Top 0.254: UPPER2.PIN3 136.48,44.48 v135,43
  Bottom 0.152: U$21.4 112.85,27.62 112.85,28.85
  Bottom 0.254: v135,43 135,28.4 128.9,22.3 117.6,22.3 116.58,23.32 116.58,29.26 116.12,29.72 113.72,29.72 112.85,28.85
BAT+  (via drill 0.4)
  Top 0.254: U$12.P10 42.98,91.53 CBAT1.1
  Top 0.406: 35.78,63.18 D1.A1-2 | U6.7 49.38,86.08 v48.9,85.6
  Top 0.61: C12.1 Q2.8 Q2.7 Q2.6 Q2.5 41.58,89.11 CBAT1.1
  Top 1.016: 35.8,61.89 D1.A1-1 | D1.A1-2 35.8,63.16 35.8,61.89 | 35.8,61.89 35.8,60 U$7.+ | C12.1 43.89,81.28 48.73,76.44 v48.73,72.5 48.73,69.89 42.03,63.18 35.78,63.18
  Bottom 0.406: v48.9,85.6 48.9,72.67 v48.73,72.5
BAT+1  (via drill 0.4)
  Top 0.254: U$19.P10 132.01,50.17 CBAT2.1
  Top 0.406: 139.22,78.52 D2.A1-2 | U3.7 125.61,55.62 v126.1,56.1
  Top 0.61: C19.1 Q1.8 Q1.7 Q1.6 Q1.5 133.42,52.59 CBAT2.1
  Top 1.016: 139.2,79.81 D2.A1-1 | D2.A1-2 139.2,78.54 139.2,79.81 | 139.2,79.81 139.2,81.7 U$18.+ | C19.1 131.11,60.42 126.27,65.26 v126.27,69.2 126.27,71.81 132.97,78.52 139.22,78.52
  Bottom 0.406: v126.1,56.1 126.1,69.03 v126.27,69.2
BAT-  (via drill 0.35, 0.65)  (2 unrouted)
  Top 0.152: U$12.PAD 45.1,91.1 U$12.P6 46.32,91.53
  Top 0.2: 46.32,91.53 RSENSE3.1
  Top 0.508: CBAT1.2 41,91.39 41,91.93 41.01,91.94 41.01,92.4 41,92.41 v41,94
  Top 0.61: RSENSE3.1 46.53,93.39 | CREG1.2 45.41,94.47 41.47,94.47 v41,94
  Top 2.54: v27.5,64.8 27.5,62.7
  PWR 2.54: v41,94 27.5,80.5 v27.5,64.8
BAT-1  (via drill 0.35, 0.65)  (2 unrouted)
  Top 0.152: U$19.PAD 129.9,50.6 U$19.P6 128.68,50.17
  Top 0.2: 128.68,50.17 RSENSE1.1
  Top 0.508: CBAT2.2 134,50.31 134,49.77 133.99,49.76 133.99,49.3 134,49.29 v134,47.7
  Top 0.61: RSENSE1.1 128.47,48.31 | CREG2.2 129.59,47.23 133.53,47.23 v134,47.7
  Top 2.54: v147.5,76.9 147.5,79
  PWR 2.54: v134,47.7 147.5,61.2 v147.5,76.9
CHARGESUPPLY  (via drill 0.65)  (2 unrouted)
  Top 0.254: v51,77 50.77,77 RX1.1 49.38,80.78 49.38,81
  Top 0.305: U6.2 49.38,81 49.38,80.51
  Top 0.61: 51,78.9 51,78.84 | 51,78.84 v51,77 | R2.1 51,78.84
  Top 1.016: 33,75 31,75
  Top 2.54: v32.86,72.4 32.12,73.14 D3.K1 32.12,77.7
  PWR 2.54: v32.86,72.4 32.86,78.36 36.5,82 51,82 v51,77
CHARGESUPPLY1  (via drill 0.65)  (2 unrouted)
  Top 0.254: v124,64.7 124.23,64.7 RX2.1 125.61,60.92 125.61,60.7
  Top 0.305: U3.2 125.61,60.7 125.61,61.19
  Top 0.61: 124,62.8 124,62.86 | 124,62.86 v124,64.7 | R9.1 124,62.86
  Top 1.016: 142,66.7 144,66.7
  Top 2.54: v142.14,69.3 142.88,68.56 D4.K1 142.88,64
  PWR 2.54: v142.14,69.3 142.14,63.34 138.5,59.7 124,59.7 v124,64.7
CHARGING  (via drill 0.35)
  Top 0.254: U6.3 50.03,85.03 v54,89 | UPPER1.PIN9 35.38,112.5 v41.3,112.5 R5.2
  Bottom 0.254: v54,89 54,99.8 v41.3,112.5
CHARGING1  (via drill 0.35)
  Top 0.254: U3.3 124.97,56.66 v121,52.7 | UPPER2.PIN9 139.62,29.2 v133.7,29.2 R13.2
  Bottom 0.254: v121,52.7 121,41.9 v133.7,29.2
EEPROM_PROT  (via drill 0.3, 0.35)
  Top 0.152: v64.82,72.3 v70,72.3
  Top 0.254: J3.P1 70.02,72.28 v70,72.3
  Bottom 0.152: 65,72.48 v64.82,72.3
  Bottom 0.254: LOWER1.PIN2 80.66,57.44 69.7,68.4 69.7,72 v70,72.3 | U$8.5 64.81,116.2 65.91,117.3 68.2,117.3 69.8,115.7 69.8,86.7 65,81.9 65,72.48
  other vias: 80.66,47.32
EEPROM_PROT1  (via drill 0.3, 0.35)
  Top 0.152: v110.18,69.4 v105,69.4
  Top 0.254: J6.P1 104.98,69.42 v105,69.4
  Bottom 0.152: 110,69.22 v110.18,69.4
  Bottom 0.254: LOWER2.PIN2 94.34,84.26 105.3,73.3 105.3,69.7 v105,69.4 | U$21.5 110.19,25.5 109.09,24.4 106.8,24.4 105.2,26 105.2,55 110,59.8 110,69.22
  other vias: 94.34,94.38
GND  (via drill 0.3, 0.35)
  Top 0.152: U$9.+ v22.4,96.8
  Top 0.2: U$12.P5 45.3,88.88
  Top 0.254: J1.4 J2.4 | J2.3 J1.3 | J1.2 J2.2 | J2.1 J1.1 | U$11.GND2 41.67,58.23 v41.7,58.2 | U$11.GND 41.67,61.17 v41.7,61.2 | R3.1 60.05,32.65 v60.1,32.7 | R4.1 59.35,42.25 v59.4,42.3
  Top 0.305: J1.1 62.35,30.25 v63.1,29.5 | J1.2 62.85,29.75 v63.1,29.5 | J1.3 63.35,29.75 v63.1,29.5 | J1.4 63.85,30.25 v63.1,29.5
  Top 0.406: U$1.P$19 v36.4,43.8 | C2.- 54.33,35.37 v54.4,35.3 | C4.2 52.56,34.6 v51.5,34.6 | C5.2 55.83,36.73 v55.8,36.7 | U$2.2 v48.81,38.61 v48.8,38.6 | U1.28 47.51,31.49 v47.5,31.5 | C1.- 54.07,31.17 | 54.07,31.17 v54.1,31.2 | C6.2 54.07,29.79 54.07,31.17 | C3.2 v55.39,31.19 v55.4,31.2 | U$3.2 v53.99,22.81 v54,22.8 | U1.12 v38.49,21.99 v38.5,22 | U1.9 34.43,40.25 v32.84,41.84 | R1.1 40.02,68.02 v40,68 | U$4.2 39.05,72.05 v39,72 | C8.2 45.13,69 v44,69 | C9.2 45.73,76.61 C7.- 44.11,78 v43,78 43,78.16 C12.2 | 45.3,88.88 45.8,88.88 RSENSE3.2 47.59,89.61 v47.6,89.6 | U6.6 49.99,87.33 49.99,88.08 49.7,88.37 v49.7,89 | C11.2 49.61,91.31 v49.6,91.3 | U$1.P$12 v39.6,54.3 | v22.2,81.6 22.23,81.63 U$6.- 27.02,82.64 v27.02,82.98 | UPPER1.PIN20 31.4,91 v32.13,91 | U$1.P$8 v55.8,52.8 | U$1.P$3 v55.8,45.3
  Top 0.508: J3.P20 72.89,72.28 v73.5,72.9 72.84,73.56 J3.P19
  GND 0.254: v41.7,58.2 41.8,58.2 42,58 | v41.7,61.2 41.8,61.2 42,61 | v60.1,32.7 60,32.7 60,33 | v59.4,42.3 59.1,42 59,42
  GND 0.406: v36.4,43.8 36,44.2 36,45 | v54.4,35.3 54.1,35 54,35 | v51.5,34.6 51.6,34.6 52,35 | v55.8,36.7 55.8,36.8 56,37 | v48.8,38.6 48.8,38.8 49,39 | v47.5,31.5 47,31 | v54.1,31.2 54.1,31.1 54,31 | v55.4,31.2 55.2,31 55,31 | v54,22.8 54,23 | v38.5,22 39,22 | v32.84,41.84 33,42 | v47.6,89.6 48,90 | v49.7,89 50,89 | v49.6,91.3 49.9,91 | v39.6,54.3 39.7,54.3 40,54 | v22.2,81.6 22,81.8 22,82 | v27.02,82.98 27,83 | v32.13,91 32,91 | v55.8,52.8 56,53 | v55.8,45.3 56,45.1 56,45
  GND 0.508: v73.5,72.9 73.9,72.9 74,73
  Bottom 0.152: v57.19,117.39 v57.2,117.4
  Bottom 0.254: U$8.2 v57.19,117.39
  pour GND: 85,18 37,18 35,20 35,39 33,41 21,41 19,43 19,94 29,104 29,121 31,123 75,123 77,121 77,64 88,53 88,21
GND1  (via drill 0.3, 0.35)
  Top 0.152: U$22.+ v152.6,44.9
  Top 0.2: U$19.P5 129.7,52.83
  Top 0.254: J4.4 J5.4 | J5.3 J4.3 | J4.2 J5.2 | J5.1 J4.1 | U$20.GND2 133.32,83.47 v133.3,83.5 | U$20.GND 133.32,80.53 v133.3,80.5 | R11.1 114.95,109.05 v114.9,109 | R12.1 115.65,99.45 v115.6,99.4
  Top 0.305: J4.1 112.64,111.45 v111.9,112.2 | J4.2 112.14,111.95 v111.9,112.2 | J4.3 111.64,111.94 v111.9,112.2 | J4.4 111.14,111.44 v111.9,112.2
  Top 0.406: U$10.P$19 v138.6,97.9 | C13.- 120.67,106.33 v120.6,106.4 | C15.2 122.44,107.1 v123.5,107.1 | C17.2 119.17,104.97 v119.2,105 | U$13.2 v126.19,103.09 v126.2,103.1 | U2.28 v127.49,110.21 v127.5,110.2 | C10.- 120.93,110.53 | 120.93,110.53 v120.9,110.5 | C16.2 120.93,111.91 120.93,110.53 | C14.2 v119.61,110.51 v119.6,110.5 | U$14.2 v121.01,118.89 v121,118.9 | U2.12 v136.51,119.71 v136.5,119.7 | U2.9 140.57,101.45 v142.16,99.86 | R10.1 134.98,73.68 v135,73.7 | U$15.2 135.95,69.65 v136,69.7 | C21.2 129.87,72.7 v131,72.7 | C22.2 129.26,65.09 C20.- 130.89,63.7 v132,63.7 132,63.54 C19.2 | 129.7,52.83 129.2,52.83 RSENSE1.2 127.41,52.09 v127.4,52.1 | U3.6 125.01,54.37 125.01,53.62 125.31,53.33 v125.31,52.7 | C18.2 125.39,50.39 v125.4,50.4 | U$10.P$12 v135.4,87.4 | v152.8,60.1 152.77,60.07 U$17.- 147.98,59.05 v147.98,58.72 | UPPER2.PIN20 143.6,50.7 v142.87,50.7 | U$10.P$8 v119.2,88.9 | U$10.P$3 v119.2,96.4
  Top 0.508: J6.P20 102.11,69.42 v101.5,68.8 102.16,68.14 J6.P19
  GND 0.254: v133.3,83.5 133.2,83.5 133,83.7 | v133.3,80.5 133.2,80.5 133,80.7 | v114.9,109 115,109 115,108.7 | v115.6,99.4 115.9,99.7 116,99.7
  GND 0.406: v138.6,97.9 139,97.5 139,96.7 | v120.6,106.4 120.9,106.7 121,106.7 | v123.5,107.1 123.4,107.1 123,106.7 | v119.2,105 119.2,104.9 119,104.7 | v126.2,103.1 126.2,102.9 126,102.7 | v127.5,110.2 128,110.7 | v120.9,110.5 120.9,110.6 121,110.7 | v119.6,110.5 119.8,110.7 120,110.7 | v121,118.9 121,118.7 | v136.5,119.7 136,119.7 | v142.16,99.86 142,99.7 | v127.4,52.1 127,51.7 | v125.31,52.7 125,52.7 | v125.4,50.4 125.1,50.7 | v135.4,87.4 135.3,87.4 135,87.7 | v152.8,60.1 153,59.9 153,59.7 | v147.98,58.72 148,58.7 | v142.87,50.7 143,50.7 | v119.2,88.9 119,88.7 | v119.2,96.4 119,96.6 119,96.7
  GND 0.508: v101.5,68.8 101.1,68.8 101,68.7
  Bottom 0.152: v117.81,24.31 v117.8,24.3
  Bottom 0.254: U$21.2 v117.81,24.31
  pour GND: 90,123.7 138,123.7 140,121.7 140,102.7 142,100.7 154,100.7 156,98.7 156,47.7 146,37.7 146,20.7 144,18.7 100,18.7 98,20.7 98,77.7 87,88.7 87,120.7
GPS_ENABLE
  Top 0.254: 57.75,38 57.75,40.5 R4.2
  Top 0.305: LOWER1.PIN16 85.56,39.54 87.25,39.54 88.3,40.59 88.3,51.01 87.31,52 71.44,52 57.75,38.31 57.75,38 57.75,36.85 53.9,33 52,33 50,35 50,37.41 U$2.3
GPS_ENABLE1
  Top 0.254: 117.25,103.7 117.25,101.2 R12.2
  Top 0.305: LOWER2.PIN16 89.44,102.16 87.75,102.16 86.7,101.11 86.7,90.69 87.69,89.7 103.56,89.7 117.25,103.39 117.25,103.7 117.25,104.85 121.1,108.7 123,108.7 125,106.7 125,104.29 U$13.3
GPS_RX
  Top 0.406: UPPER1.PIN5 45.6,102.3 57.2,90.7 57.2,55.4 56.1,54.3 U$1.P$9
GPS_RX1
  Top 0.406: UPPER2.PIN5 129.4,39.4 117.8,51 117.8,86.3 118.9,87.4 U$10.P$9
GPS_TX
  Top 0.406: UPPER1.PIN16 31.9,101 45.1,101 56.1,90 56.1,56.3 55.6,55.8 U$1.P$10
GPS_TX1
  Top 0.406: UPPER2.PIN16 143.1,40.7 129.9,40.7 118.9,51.7 118.9,85.4 119.4,85.9 U$10.P$10
HOTSWAP_INT  (via drill 0.35)
  Top 0.254: J3.P3 70.03,74.83 v70,74.8
  Bottom 0.254: LOWER1.PIN3 79.3,46.48 79.3,57.6 68.7,68.2 68.7,73.5 v70,74.8
  other vias: 81,44.78
HOTSWAP_INT1  (via drill 0.35)
  Top 0.254: J6.P3 104.97,66.88 v105,66.9
  Bottom 0.254: LOWER2.PIN3 95.7,95.22 95.7,84.1 106.3,73.5 106.3,68.2 v105,66.9
  other vias: 94,96.92
MOD_G0
  Top 0.254: LOWER1.PIN1 73.5,49.86 68.36,44.71 J2.13 J1.13
MOD_G1
  Top 0.254: LOWER2.PIN1 101.5,91.84 106.64,96.99 J5.13 J4.13
MOD_G2  (via drill 0.3, 0.35)
  Top 0.152: v64.32,73.5 v69.9,73.5
  Top 0.254: J3.P2 70.97,73.5 v69.9,73.5
  Bottom 0.254: LOWER1.PIN18 82.27,44.78 80,47.05 80,49 80,57.5 69.2,68.3 69.2,72.8 v69.9,73.5 | U$8.6 67.35,116.15 67.7,116.5 68.1,116.5 69.19,115.41 69.19,86.83 64.32,81.95 v64.32,73.5
  other vias: 85.4,44.78
MOD_G3  (via drill 0.3, 0.35)
  Top 0.152: v110.68,68.2 v105.1,68.2
  Top 0.254: J6.P2 104.03,68.2 v105.1,68.2
  Bottom 0.254: LOWER2.PIN18 92.73,96.92 95,94.65 95,92.7 95,84.2 105.8,73.4 105.8,68.9 v105.1,68.2 | U$21.6 107.65,25.55 107.3,25.2 106.9,25.2 105.81,26.3 105.81,54.87 110.68,59.75 v110.68,68.2
  other vias: 89.6,96.92
MOD_G4  (via drill 0.35)
  Top 0.254: J6.P5 104.03,64.4 v105,64.4
  Bottom 0.254: LOWER2.PIN4 97.11,96.35 97.11,83.84 107.11,73.84 107.11,66.51 v105,64.4
  other vias: 94,99.46
MOD_G5  (via drill 0.35)
  Top 0.254: J3.P5 70.97,77.3 v70,77.3
  Bottom 0.254: LOWER1.PIN4 77.89,45.35 77.89,57.86 67.89,67.86 67.89,75.19 v70,77.3
  other vias: 81,42.24
MOD_G6
  Top 0.254: LOWER2.PIN19 90.58,95.7 104.07,95.7 106.14,97.78 J5.14 J4.14
MOD_G7
  Top 0.254: LOWER2.PIN20 91.81,91.84 92.72,90.93 101.87,90.93 107.14,96.2 J5.12 J4.12
MOD_G13
  Top 0.254: LOWER1.PIN19 84.42,46 70.93,46 68.86,43.92 J2.14 J1.14
MOD_G14
  Top 0.254: LOWER1.PIN20 83.19,49.86 82.28,50.77 73.13,50.77 67.86,45.5 J2.12 J1.12
MOD_MISO  (via drill 0.3, 0.35)
  Top 0.152: v62.3,83.7 62.31,83.72
  Top 0.254: J3.P10 70.02,83.72 | 70.02,83.72 v70,83.7 | 62.31,83.72 70.02,83.72
  Bottom 0.254: LOWER1.PIN10 78.59,29.07 78.59,41.11 75.37,44.33 75.37,57.5 65.86,67.02 65.86,79.56 v70,83.7 | U$8.10 59.73,107.8 62.3,105.23 v62.3,83.7
  other vias: 80.66,27
MOD_MISO1  (via drill 0.3, 0.35)
  Top 0.152: v112.7,58 112.69,57.98
  Top 0.254: J6.P10 104.98,57.98 | 104.98,57.98 v105,58 | 112.69,57.98 104.98,57.98
  Bottom 0.254: LOWER2.PIN10 96.41,112.63 96.41,100.59 99.63,97.37 99.63,84.2 109.14,74.68 109.14,62.15 v105,58 | U$21.10 115.27,33.9 112.7,36.47 v112.7,58
  other vias: 94.34,114.7
MOD_MOSI  (via drill 0.3, 0.35)
  Top 0.152: v61.5,81.2 61.52,81.17
  Top 0.254: J3.P8 69.92,81.17 | 69.92,81.17 v69.9,81.2 | 61.52,81.17 69.92,81.17
  Bottom 0.152: v61.49,81.21 v61.5,81.2
  Bottom 0.254: LOWER1.PIN12 83.86,31.42 80.73,31.42 80,32.15 80,40.85 76.19,44.66 76.19,57.84 66.67,67.36 66.67,77.97 v69.9,81.2 | U$8.11 57.19,107.8 61.49,103.5 v61.49,81.21
  other vias: 85.74,29.54
MOD_MOSI1  (via drill 0.3, 0.35)
  Top 0.152: v113.5,60.5 113.47,60.52
  Top 0.254: J6.P8 105.08,60.52 | 105.08,60.52 v105.1,60.5 | 113.47,60.52 105.08,60.52
  Bottom 0.152: v113.51,60.49 v113.5,60.5
  Bottom 0.254: LOWER2.PIN12 91.14,110.28 94.27,110.28 95,109.55 95,100.85 98.81,97.04 98.81,83.86 108.33,74.34 108.33,63.73 v105.1,60.5 | U$21.11 117.81,33.9 113.51,38.2 v113.51,60.49
  other vias: 89.26,112.16
MOD_SCK  (via drill 0.3, 0.35)
  Top 0.254: J3.P9 70.05,82.44 v70,82.4 v60.3,82.4
  Bottom 0.254: LOWER1.PIN9 79,31.2 79,41.28 75.78,44.49 75.78,57.67 66.26,67.19 66.26,78.66 v70,82.4 | U$8.12 54.65,107.8 60.3,102.15 v60.3,82.4
  other vias: 80.66,29.54
MOD_SCK1  (via drill 0.3, 0.35)
  Top 0.254: J6.P9 104.95,59.26 v105,59.3 v114.7,59.3
  Bottom 0.254: LOWER2.PIN9 96,110.5 96,100.42 99.22,97.2 99.22,84.03 108.74,74.51 108.74,63.04 v105,59.3 | U$21.12 120.35,33.9 114.7,39.55 v114.7,59.3
  other vias: 94.34,112.16
MOD_SCL  (via drill 0.3, 0.35)
  Top 0.152: v63.6,78.6 63.9,78.6 63.94,78.64
  Top 0.254: J3.P6 70.03,78.64 | 70.03,78.64 v70,78.6 | 63.94,78.64 70.03,78.64
  Bottom 0.152: 63.81,78.81 v63.6,78.6
  Bottom 0.254: LOWER1.PIN13 85.4,36.6 77,45 77,58.18 67.48,67.69 67.48,76.08 v70,78.6 | U$8.8 64.81,107.77 63.81,106.78 63.81,78.81
  other vias: 85.4,32.08
MOD_SCL1  (via drill 0.3, 0.35)
  Top 0.152: v111.4,63.1 111.1,63.1 111.06,63.06
  Top 0.254: J6.P6 104.97,63.06 | 104.97,63.06 v105,63.1 | 111.06,63.06 104.97,63.06
  Bottom 0.152: 111.19,62.89 v111.4,63.1
  Bottom 0.254: LOWER2.PIN13 89.6,105.1 98,96.7 98,83.52 107.52,74 107.52,65.62 v105,63.1 | U$21.8 110.19,33.93 111.19,34.92 111.19,62.89
  other vias: 89.6,109.62
MOD_SDA  (via drill 0.3, 0.35)
  Top 0.152: v63.13,79.9 v63.14,79.91
  Top 0.254: J3.P7 v70,79.91 | v70,79.91 v70,79.9 | v63.14,79.91 v70,79.91
  Bottom 0.254: v70,79.9 67.07,76.97 67.07,67.53 76.59,58.01 76.59,44.83 81,40.42 LOWER1.PIN8 | U$8.9 62.27,107.8 63.37,106.7 63.37,80.14 v63.13,79.9
  other vias: 81,32.08
MOD_SDA1  (via drill 0.3, 0.35)
  Top 0.152: v111.87,61.8 v111.86,61.8
  Top 0.254: J6.P7 v105,61.8 | v105,61.8 | v111.86,61.8 v105,61.8
  Bottom 0.254: v105,61.8 107.93,64.73 107.93,74.17 98.41,83.69 98.41,96.87 94,101.28 LOWER2.PIN8 | U$21.9 112.73,33.9 111.63,35 111.63,61.56 v111.87,61.8
  other vias: 94,109.62
N$1
  Top 0.305: C3.1 55.39,26.92 U$3.4
N$2
  Top 0.305: U$2.4 52.6,36.31 C4.1
N$3
  Top 0.305: U$1.P$1 54.33,42.15 C2.+ C5.1
  Top 0.406: U$2.5 54.3,39.56 C2.+
N$4
  Top 0.254: U$1.P$11 U$11.ANT
N$5
  Top 0.406: R2.2 51.74,81.92 U6.4
N$6
  Top 0.406: U$4.4 45.45,71.1 C8.1
N$7
  Top 0.254: U$2.1 50.2,39.61 FB1.2
N$8
  Top 0.406: U$4.3 40.31,71.1 R1.2 39.99,70.77 31.03,70.77 27.07,66.82 21.3,66.82 20.48,66 20.48,59.35 20.5,56.37 21.55,55.32 21.55,48.38 U$5.2
N$9  (via drill 4.2 pad 6)
  other vias: 61,61
N$11
  Top 0.305: C14.1 119.61,114.78 U$14.4
N$12
  Top 0.305: U$13.4 122.4,105.39 C15.1
N$13
  Top 0.305: U$10.P$1 120.67,99.55 C13.+ C17.1
  Top 0.406: U$13.5 120.7,102.14 C13.+
N$14  (1 unrouted)
  Top 0.61: RX1.2 48.19,82.34 47.93,82.59 | 47.93,82.59 48.32,82.98 48.68,82.98 48.68,82.83 48.44,82.59 | 47.93,82.59 47.3,83.22 Q2.1 Q2.2 Q2.3
N$16  (1 unrouted)
  Top 0.61: RX2.2 126.81,59.36 127.07,59.11 | 127.07,59.11 126.68,58.72 126.32,58.72 126.32,58.87 126.56,59.11 | 127.07,59.11 127.7,58.48 Q1.1 Q1.2 Q1.3
N$17
  Top 0.305: Q2.4 48.06,87.03 48.3,87.28 U6.8
N$18
  Top 0.305: C11.1 50.69,89.19 U6.5
N$19
  Top 0.2: U$12.P7 44.7,93.48 CREG1.1
N$20
  Top 0.305: Q1.4 126.94,54.66 126.7,54.42 U3.8
N$21
  Top 0.305: C18.1 124.31,52.51 U3.5
N$22
  Top 0.2: U$19.P7 130.3,48.22 CREG2.1
N$23
  Top 0.406: R9.2 123.26,59.78 U3.4
N$24
  Top 0.406: U$15.4 129.55,70.6 C21.1
N$25
  Top 0.406: U$15.3 134.69,70.6 R10.2 135.01,70.93 143.97,70.93 147.93,74.88 153.7,74.88 154.52,75.7 154.52,82.35 154.5,85.33 153.45,86.38 153.45,93.32 U$16.2
N$26
  Top 0.254: U$10.P$11 U$20.ANT
N$27
  Top 0.254: U$13.1 124.8,102.09 FB2.2
N$28  (via drill 4.2 pad 6)
  other vias: 114,80.7
RAD_SCL  (via drill 0.35)
  Top 0.2: U$12.P3 44.3,88.2 43.91,87.81 v43.24,87.81
  Top 0.254: LOWER1.PIN14 83.87,34.62 82.96,35.53 76.6,35.53 | 76.6,35.53 75.53,35.53 70.98,30.98 J1.16 J2.16 69.86,42.35 v71.9,44.4 | R6.1 76.6,35.53
  Bottom 0.406: v71.9,44.4 46,70.3 46,85.05 v43.24,87.81
RAD_SCL1  (via drill 0.35)
  Top 0.2: U$19.P3 130.7,53.5 131.09,53.89 v131.76,53.89
  Top 0.254: LOWER2.PIN14 91.13,107.08 92.04,106.17 98.4,106.17 | 98.4,106.17 99.47,106.17 104.02,110.72 J4.16 J5.16 105.14,99.34 v103.1,97.3 | R14.1 98.4,106.17
  Bottom 0.406: v103.1,97.3 129,71.4 129,56.65 v131.76,53.89
RAD_SDA  (via drill 0.35)
  Top 0.2: U$12.P4 44.7,85.59 44.24,85.13
  Top 0.254: 44.24,85.13 v44.26,85.12 | LOWER1.PIN7 76.6,34.62 | 76.6,34.62 75.62,34.62 71,30 69.7,30 69.36,30.34 J1.15 J2.15 69.36,43.14 v70.26,44.04 | R7.1 76.6,34.62
  Bottom 0.406: v70.26,44.04 44.26,70.05 v44.26,85.12
RAD_SDA1  (via drill 0.35)
  Top 0.2: U$19.P4 130.3,56.11 130.76,56.57
  Top 0.254: 130.76,56.57 v130.75,56.58 | LOWER2.PIN7 98.4,107.08 | 98.4,107.08 99.38,107.08 104,111.7 105.3,111.7 105.64,111.36 J4.15 J5.15 105.64,98.56 v104.74,97.66 | R15.1 98.4,107.08
  Bottom 0.406: v104.74,97.66 130.75,71.66 v130.75,56.58
RADIO_MISO  (via drill 0.35, 0.4)
  Top 0.254: U1.17 43.57,21.65 v43.21,22.01 40.83,24.39 40.83,35.93 30.62,46.14 30.62,52.35 31.28,53.02 v31.28,54.65 | J2.9 J1.9 66.38,30.95 66.38,25.5 62.88,22 v52,22
  Bottom 0.254: v31.28,54.65 31.01,54.92 31.01,104.28 31.4,104.67 31.4,106.58 UPPER1.PIN14 | v52,22 v43.22,22 v43.21,22.01
  other vias: 30.6,107.38
RADIO_MISO1  (via drill 0.35, 0.4)
  Top 0.254: U2.17 131.43,120.05 v131.79,119.69 134.17,117.31 134.17,105.77 144.38,95.56 144.38,89.35 143.72,88.68 v143.72,87.05 | J5.9 J4.9 108.62,110.75 108.62,116.2 112.12,119.7 v123,119.7
  Bottom 0.254: v143.72,87.05 143.99,86.78 143.99,37.42 143.6,37.02 143.6,35.12 UPPER2.PIN14 | v123,119.7 v131.78,119.7 v131.79,119.69
  other vias: 144.4,34.32
RADIO_MOSI  (via drill 0.35, 0.4)
  Top 0.254: U1.15 41.54,20.95 v40.45,22.05 40.38,22.11 40.38,35.8 30.1,46.08 v30.1,52.8 | J1.10 J2.10 66.86,43.15 v66,44
  Bottom 0.254: UPPER1.PIN15 30.6,53.3 v30.1,52.8 | v66,44 47,44 38,35 38,24.49 v40.45,22.05
  other vias: 30.6,104.84 30.6,104.84
RADIO_MOSI1  (via drill 0.35, 0.4)
  Top 0.254: U2.15 133.46,120.75 v134.56,119.66 134.62,119.59 134.62,105.9 144.9,95.62 v144.9,88.9 | J4.10 J5.10 108.14,98.56 v109,97.7
  Bottom 0.254: UPPER2.PIN15 144.4,88.4 v144.9,88.9 | v109,97.7 128,97.7 137,106.7 137,117.21 v134.56,119.66
  other vias: 144.4,36.86 144.4,36.86
RADIO_SCK  (via drill 0.35, 0.4)  (1 unrouted)
  Top 0.254: U1.18 v44.59,23 44.59,23.48 45.3,24.19 45.3,28.36 41.24,32.42 41.24,36.09 31.21,46.12 31.21,51.45 v31.97,52.21 | J2.11 J1.11 67.36,25.36 v66,24
  Bottom 0.254: v33.63,104.84 31.48,102.69 31.48,55.59 31.97,55.1 v31.97,52.21 | v66,24 45.59,24 v44.59,23
RADIO_SCK1  (via drill 0.35, 0.4)  (1 unrouted)
  Top 0.254: U2.18 v130.41,118.7 130.41,118.22 129.7,117.51 129.7,113.34 133.76,109.28 133.76,105.61 143.79,95.58 143.79,90.25 v143.03,89.49 | J5.11 J4.11 107.64,116.34 v109,117.7
  Bottom 0.254: v141.37,36.86 143.52,39.01 143.52,86.11 143.03,86.6 v143.03,89.49 | v109,117.7 129.41,117.7 v130.41,118.7
SOL+
  Top 1.016: U$6.+ 35.77,79.63 35.8,79.6 35.8,78.39 D3.A2-2 D3.A2-1
SOL+1
  Top 1.016: U$17.+ 139.23,62.07 139.2,62.1 139.2,63.31 D4.A2-2 D4.A2-1
UNREG  (via drill 0.3, 0.35, 0.6)
  Top 0.254: J1.8 J2.8 | J2.7 J1.7 | J1.6 J2.6 | J2.5 J1.5 | U$3.1 52.01,25.15 v52.01,25.2 | FB1.1 46.5,36.4 46.9,36 v48,36
  Top 0.305: J1.5 64.36,30.25 v65.1,29.5 | J1.8 65.86,30.25 v65.1,29.5 | J1.7 65.36,29.75 v65.1,29.5 | J1.6 64.86,29.75 v65.1,29.5 | U$5.C v22.9,47
  Top 0.508: J3.P14 72.91,79.91 v73.5,80.5 72.83,81.17 J3.P13 | U$4.1 41,73 v40,74
  Top 1.27: D1.K1 D1.K2 32.12,67.12 v33,68
  PWR 0.254: v52.01,25.2 52.01,25 52,25
  PWR 0.305: v65.1,29.5 65,29.6 65,30
  PWR 0.508: v73.5,80.5 73,81
  Bottom 0.254: U$8.1 53.6,114.5 v52.9,115.2
  pour PWR: 85,18 37,18 35,20 35,39 33,41 21,41 19,43 19,59 21,61 28,61 30,63 30,69 31,70 34,70 36,72 36,73 38,75 52,75 54,77 54,83 52,85 44,85 43,86 43,95 42,96 37,96 34,93 34,91 25,82 25,66 23,64 21,64 19,66 19,94 29,104 29,121 31,123 75,123 77,121 77,64 88,53 88,21
UNREG1  (via drill 0.3, 0.35, 0.6)
  Top 0.254: J4.8 J5.8 | J5.7 J4.7 | J4.6 J5.6 | J5.5 J4.5 | U$14.1 123,116.55 v123,116.5 | FB2.1 128.5,105.3 128.1,105.7 v127,105.7
  Top 0.305: J4.5 110.64,111.45 v109.9,112.2 | J4.8 109.14,111.44 v109.9,112.2 | J4.7 109.64,111.94 v109.9,112.2 | J4.6 110.14,111.95 v109.9,112.2 | U$16.C v152.1,94.7
  Top 0.508: J6.P14 102.09,61.8 v101.5,61.2 102.17,60.52 J6.P13 | U$15.1 134,68.7 v135,67.7
  Top 1.27: D2.K1 D2.K2 142.88,74.58 v142,73.7
  PWR 0.254: v123,116.5 123,116.69 123,116.7
  PWR 0.305: v109.9,112.2 110,112.1 110,111.7
  PWR 0.508: v101.5,61.2 102,60.7
  Bottom 0.254: U$21.1 121.4,27.2 v122.1,26.5
  pour PWR: 90,123.7 138,123.7 140,121.7 140,102.7 142,100.7 154,100.7 156,98.7 156,82.7 154,80.7 147,80.7 145,78.7 145,72.7 144,71.7 141,71.7 139,69.7 139,68.7 137,66.7 123,66.7 121,64.7 121,58.7 123,56.7 131,56.7 132,55.7 132,46.7 133,45.7 138,45.7 141,48.7 141,50.7 150,59.7 150,75.7 152,77.7 154,77.7 156,75.7 156,47.7 146,37.7 146,20.7 144,18.7 100,18.7 98,20.7 98,77.7 87,88.7 87,120.7
V1  (via drill 0.35)
  Top 0.61: D2.A2-1 138.59,76.6 | 138.59,76.6 v137.7,76.6 | D2.A2-2 138.6,76.6 138.59,76.6 | D4.A1-2 138.6,66.5 | 138.6,66.5 v137.7,66.5 | D4.A1-1 139.23,67.13 138.6,66.5
  Bottom 0.61: LOWER2.PIN11 89.26,117.7 94.26,122.7 135,122.7 139,118.7 139,107.7 131,99.7 131,94.7 137.7,88 v137.7,76.6 v137.7,66.5
  other vias: 89.26,114.7
V5  (via drill 0.35)
  Top 0.61: D1.A2-1 36.41,65.1 | 36.41,65.1 v37.3,65.1 | D1.A2-2 36.4,65.1 36.41,65.1 | D3.A1-2 36.4,75.2 | 36.4,75.2 v37.3,75.2 | D3.A1-1 35.77,74.57 36.4,75.2
  Bottom 0.61: LOWER1.PIN11 85.74,24 80.74,19 40,19 36,23 36,34 44,42 44,47 37.3,53.7 v37.3,65.1 v37.3,75.2
  other vias: 85.74,27
VBACKUP  (via drill 0.4, 0.45)
  Top 0.305: v40.2,46.87 54.1,46.87 U$1.P$4
  Bottom 0.305: UPPER1.PIN1 35.36,92.12 35.36,51.71 v40.2,46.87
  other vias: 35.34,92.14
VBACKUP1  (via drill 0.4, 0.45)
  Top 0.305: v134.8,94.83 120.9,94.83 U$10.P$4
  Bottom 0.305: UPPER2.PIN1 139.64,49.58 139.64,89.99 v134.8,94.83
  other vias: 139.66,49.56
WIFI_3V1
  Top 0.254: U2.22 123.69,116.31 123.68,116.3
  Top 0.305: 123.68,115.23 U$14.5 121.96,113.73 122.01,113.68 | 123.68,115.23 125.65,115.23 U2.23 | C16.1 122.01,113.68 | 122.01,113.68 C10.+ | 123.68,115.23 123.68,116.3 123.68,118.34 U2.20 129.12,123.78 138.31,123.78 138.54,123.55 U2.10
WIFI_3V3
  Top 0.254: U1.22 51.31,25.39 51.32,25.4
  Top 0.305: 51.32,26.47 U$3.5 53.04,27.97 52.99,28.02 | 51.32,26.47 49.35,26.47 U1.23 | C6.1 52.99,28.02 | 52.99,28.02 C1.+ | 51.32,26.47 51.32,25.4 51.32,23.36 U1.20 45.88,17.92 36.69,17.92 36.46,18.15 U1.10
WIFI_CS  (via drill 0.3, 0.4)
  Top 0.254: v46.17,28.07 41.64,32.59 41.64,36.26 31.73,46.18 31.73,50.37 v31.89,50.53 | U1.16 42.56,21.04 v42.1,21.5
  Bottom 0.254: UPPER1.PIN13 34.45,106.07 34.45,51.95 33.03,50.53 v31.89,50.53 | v42.1,21.5 42.1,22.2 46.17,26.27 v46.17,28.07
  other vias: 30.6,109.92
WIFI_CS1  (via drill 0.3, 0.4)
  Top 0.254: v128.83,113.63 133.36,109.11 133.36,105.44 143.27,95.52 143.27,91.33 v143.11,91.17 | U2.16 132.44,120.66 v132.9,120.2
  Bottom 0.254: UPPER2.PIN13 140.55,35.63 140.55,89.75 141.97,91.17 v143.11,91.17 | v132.9,120.2 132.9,119.5 128.83,115.43 v128.83,113.63
  other vias: 144.4,31.78
WIFI_ENABLE
  Top 0.254: 58.75,29 58.75,30.9 R3.2
  Top 0.305: U$3.3 58.75,27.93 58.75,29 58.75,29.06 61.9,32.21 61.9,41.82 71.58,51.5 87.17,51.5 87.84,50.82 87.84,41.78 87.07,41 82.3,41 LOWER1.PIN5
WIFI_ENABLE1
  Top 0.254: 116.25,112.7 116.25,110.8 R11.2
  Top 0.305: U$14.3 116.25,113.77 116.25,112.7 116.25,112.64 113.1,109.49 113.1,99.88 103.42,90.2 87.83,90.2 87.16,90.88 87.16,99.92 87.93,100.7 92.7,100.7 LOWER2.PIN5
WIFI_IRQ  (via drill 0.35)
  Top 0.203: v28.77,46.87 29.59,46.05 29.59,46.02
  Top 0.254: U1.13 39.51,32.27 38.71,33.06 38.71,36.89 29.59,46.02
  Bottom 0.203: UPPER1.PIN12 29.94,112.14 29.94,54.45 28.77,53.27 v28.77,46.87
  other vias: 30.26,112.46
WIFI_IRQ1  (via drill 0.35)
  Top 0.203: v146.23,94.83 145.41,95.65 145.41,95.68
  Top 0.254: U2.13 135.49,109.43 136.29,108.64 136.29,104.81 145.41,95.68
  Bottom 0.203: UPPER2.PIN12 145.06,29.56 145.06,87.25 146.23,88.42 v146.23,94.83
  other vias: 144.74,29.24
WIFI_RST  (via drill 0.4)
  Top 0.254: U1.4 43.57,34.68 42.18,36.08 v42.18,45.81
  Bottom 0.254: UPPER1.PIN8 36.31,108.61 36.31,51.77 42.18,45.91 v42.18,45.81
  other vias: 35,109.92
WIFI_RST1  (via drill 0.4)
  Top 0.254: U2.4 131.43,107.02 132.82,105.62 v132.82,95.89
  Bottom 0.254: UPPER2.PIN8 138.69,33.09 138.69,89.93 132.82,95.79 v132.82,95.89
  other vias: 140,31.78
WIFI_WAKE  (via drill 0.35, 0.4)
  Top 0.203: UPPER1.PIN7 35,106.48 35.02,106.46 34.56,106.01 28.61,106.01 28.16,105.55 v28.16,104.27
  Top 0.254: U1.11 37.48,32.27 38.31,33.09 38.31,35.35 36.69,36.97 v35.78,36.97
  Bottom 0.203: v28.16,104.27 28.16,47.16 28.14,47.14 28.14,44.61 v35.78,36.97
WIFI_WAKE1  (via drill 0.35, 0.4)
  Top 0.203: UPPER2.PIN7 140,35.22 139.99,35.24 140.44,35.69 146.39,35.69 146.84,36.15 v146.84,37.43
  Top 0.254: U2.11 137.52,109.43 136.69,108.61 136.69,106.35 138.31,104.73 v139.22,104.73
  Bottom 0.203: v146.84,37.43 146.84,94.54 146.87,94.56 146.87,97.09 v139.22,104.73
XBTN  (via drill 0.35)
  Top 0.152: 59.62,85.37 R8.2 | U$9.- 26.2,99.3
  Top 0.254: J3.P4 70.09,76.09 v70,76 69.98,76.02 64.96,76.02 59.62,81.36 59.62,85.37 | R8.2 59.75,89.06 45.25,103.56 27.86,103.56 26.2,101.9 26.2,99.3
  Bottom 0.254: LOWER1.PIN17 82.36,42.24 78.6,46 78.6,57.73 68.29,68.03 68.29,73.77 68.3,73.78 68.3,74.3 v70,76
  other vias: 85.4,42.24
XBTN1  (via drill 0.35)
  Top 0.152: 115.38,56.33 R16.2 | U$22.- 148.8,42.4
  Top 0.254: J6.P4 104.91,65.61 v105,65.7 105.02,65.68 110.04,65.68 115.38,60.34 115.38,56.33 | R16.2 115.25,52.64 129.75,38.14 147.14,38.14 148.8,39.8 148.8,42.4
  Bottom 0.254: LOWER2.PIN17 92.64,99.46 96.4,95.7 96.4,83.97 106.71,73.67 106.71,67.93 106.7,67.92 106.7,67.4 v105,65.7
  other vias: 89.6,99.46

## Text on the board
tNames: PA1 | WIFI | BTN | OFF|ON | GPS | BATTERY | SOLAR | SOLAR | BATTERY | GPS | OFF|ON | BTN | WIFI | PA1